# Altium PCB EMG_MainBoard_Layout.PcbDoc (part 1 of 5)
Units mm, origin at the board's own origin, x right, y up, seen from the top; angles counter-clockwise.
Board outline 80 x 45 mm, 4 copper layers (L1 TOP, L2 GND, L3 POWER SIGNAL, L4 BOTTOM GND), stack 1.164 mm thick; 231 components, 136 nets, 808 pads, 48 vias.
Unrouted connection lines stored in the file: 570.
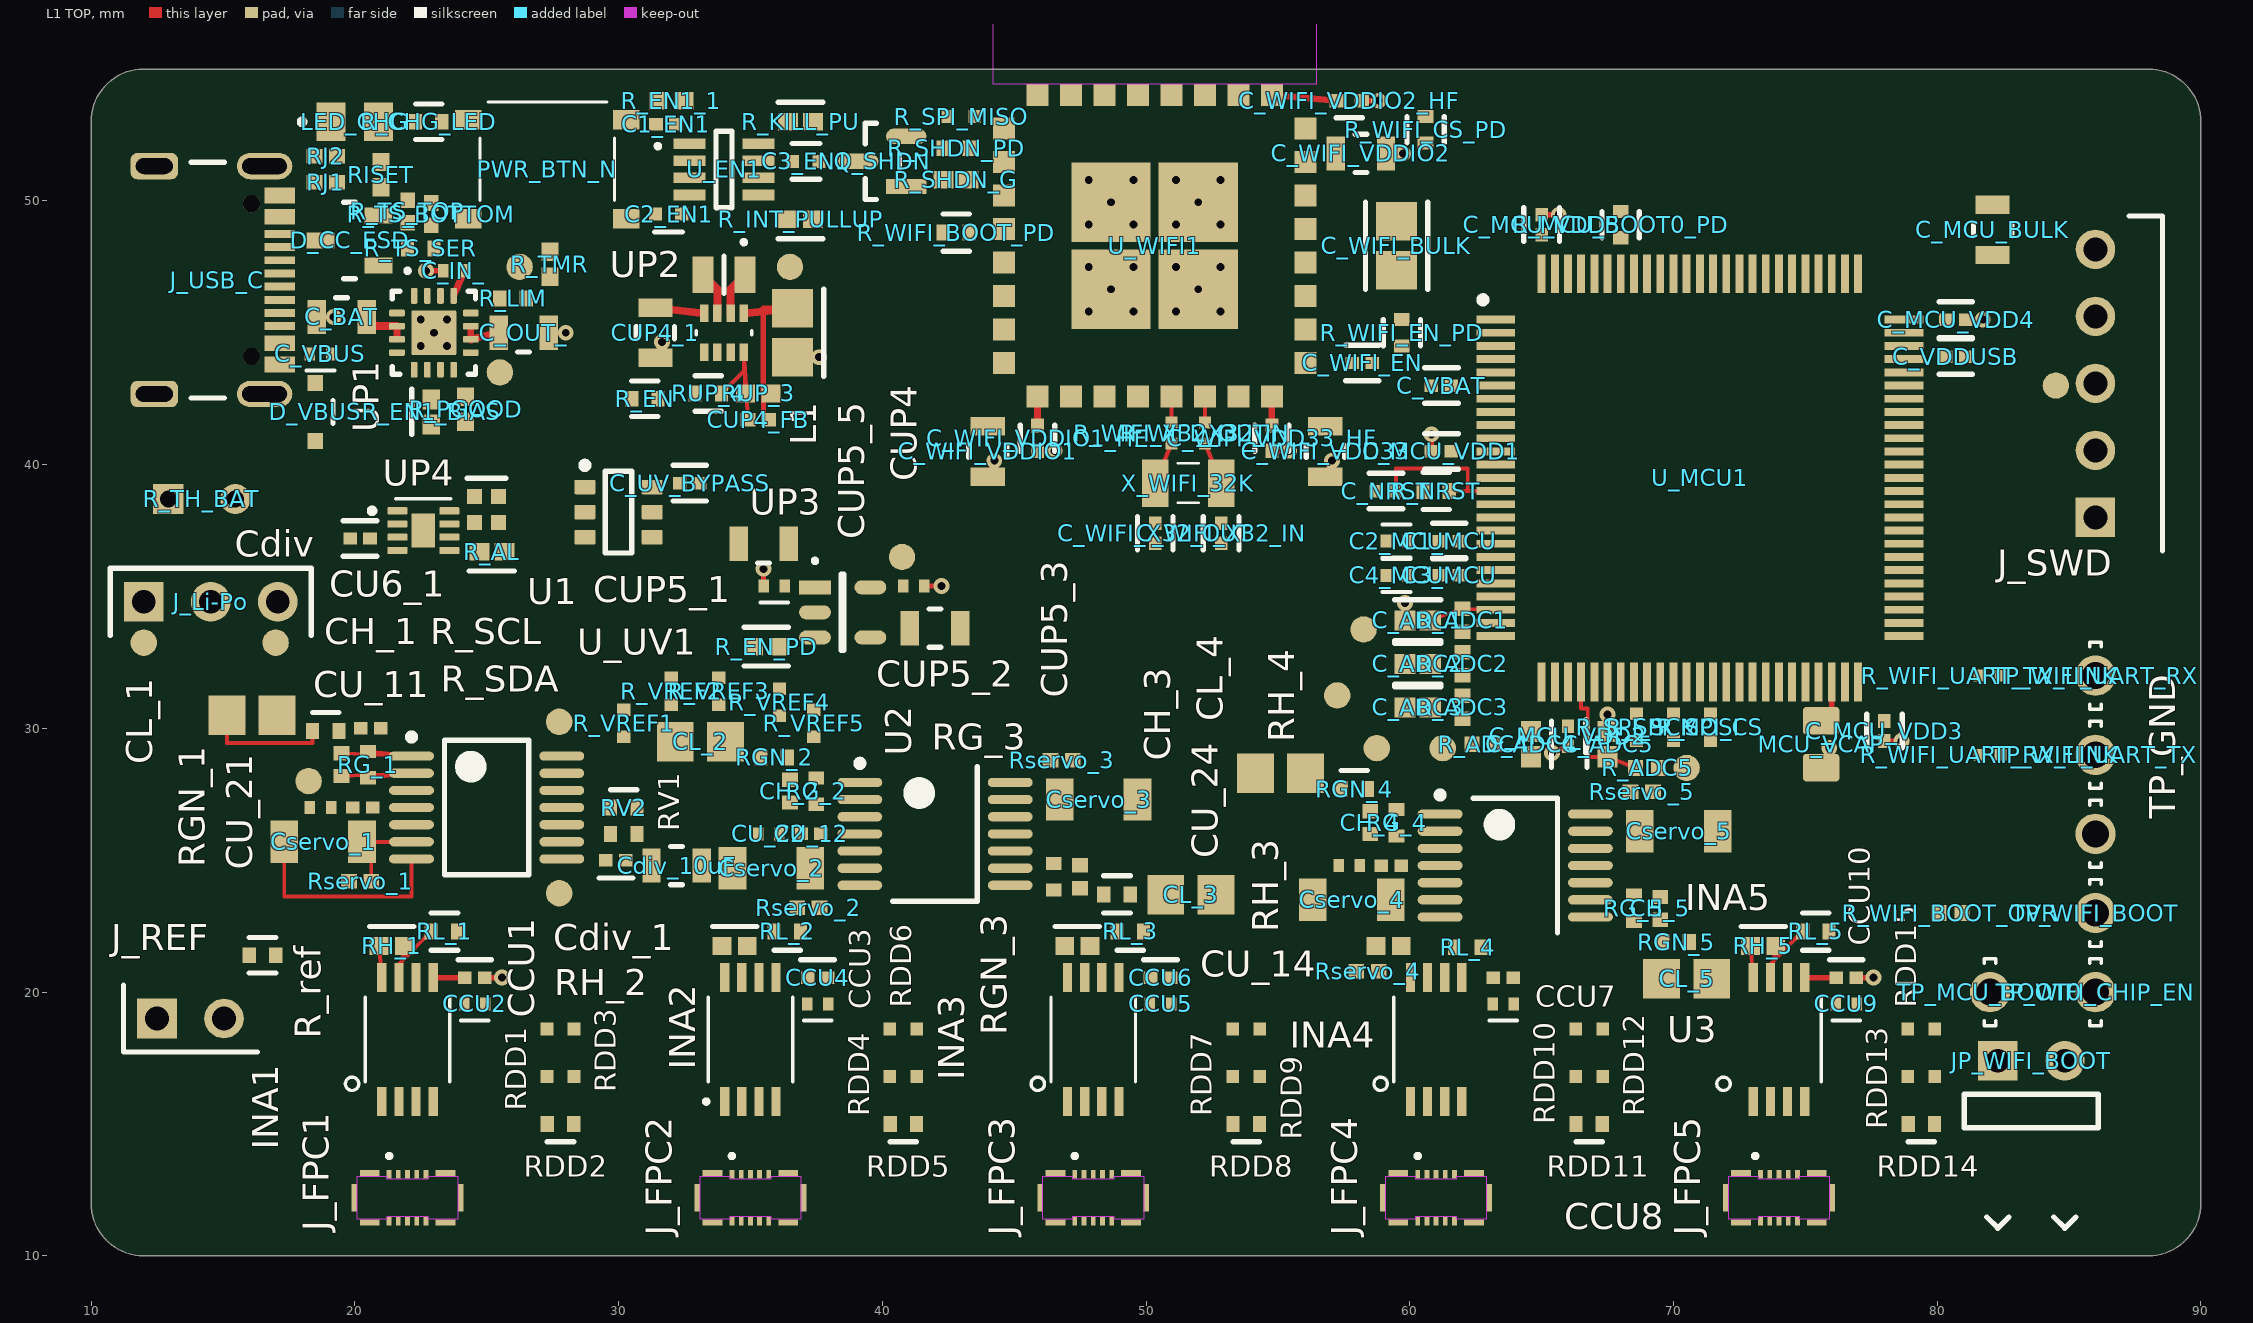
[diagram p0: L1 TOP view]
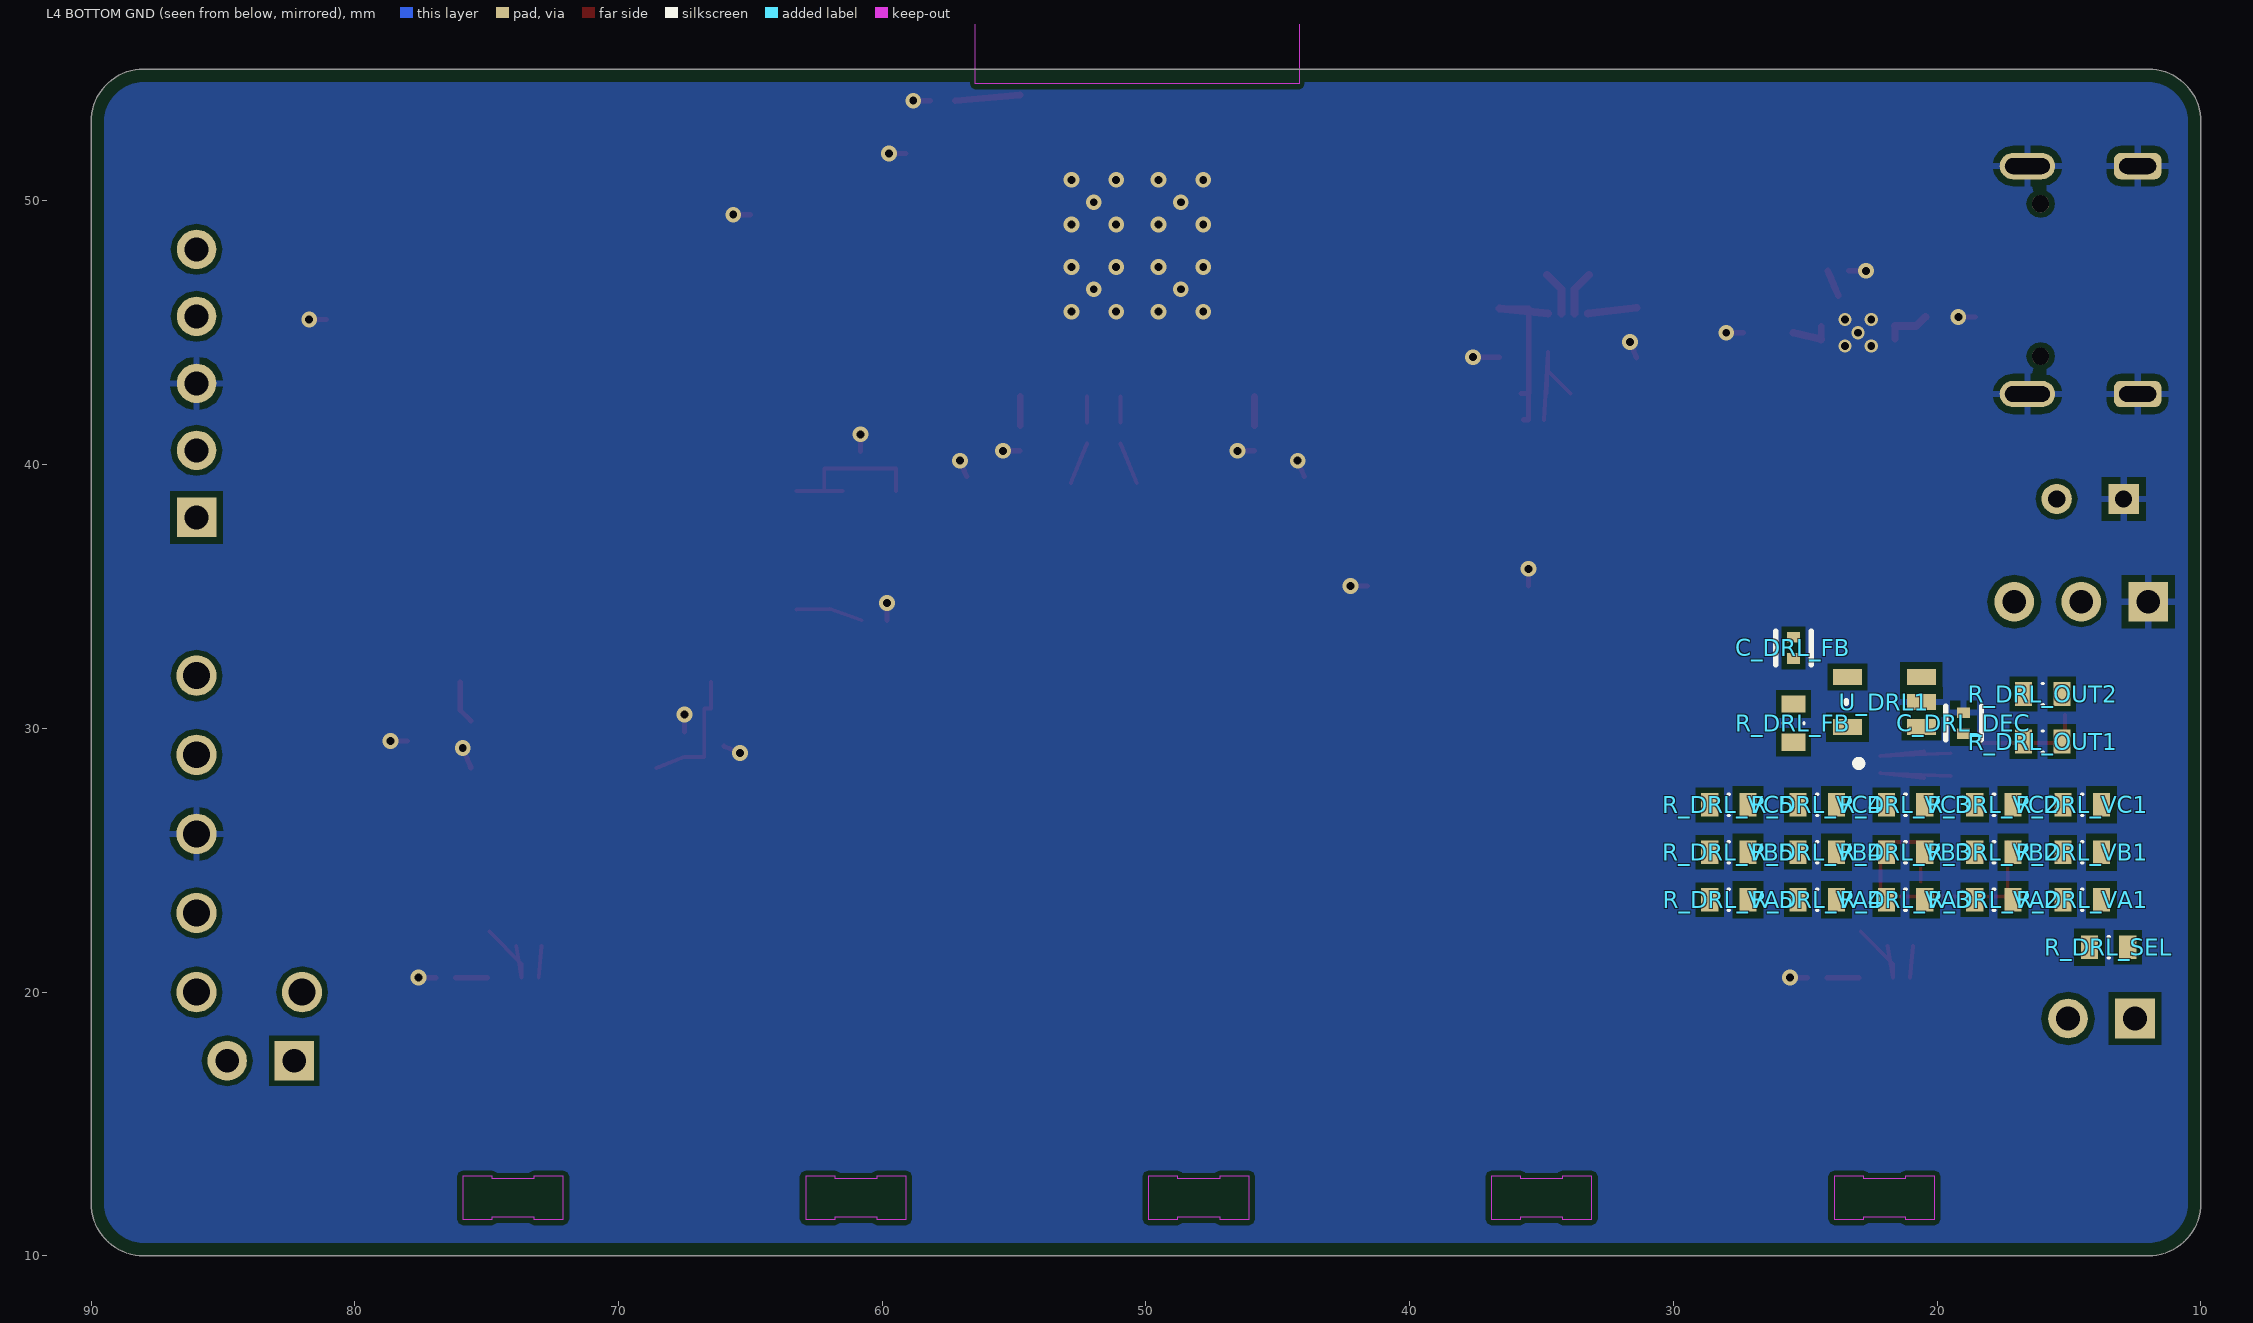
[diagram p1: L4 BOTTOM GND view, seen from below]
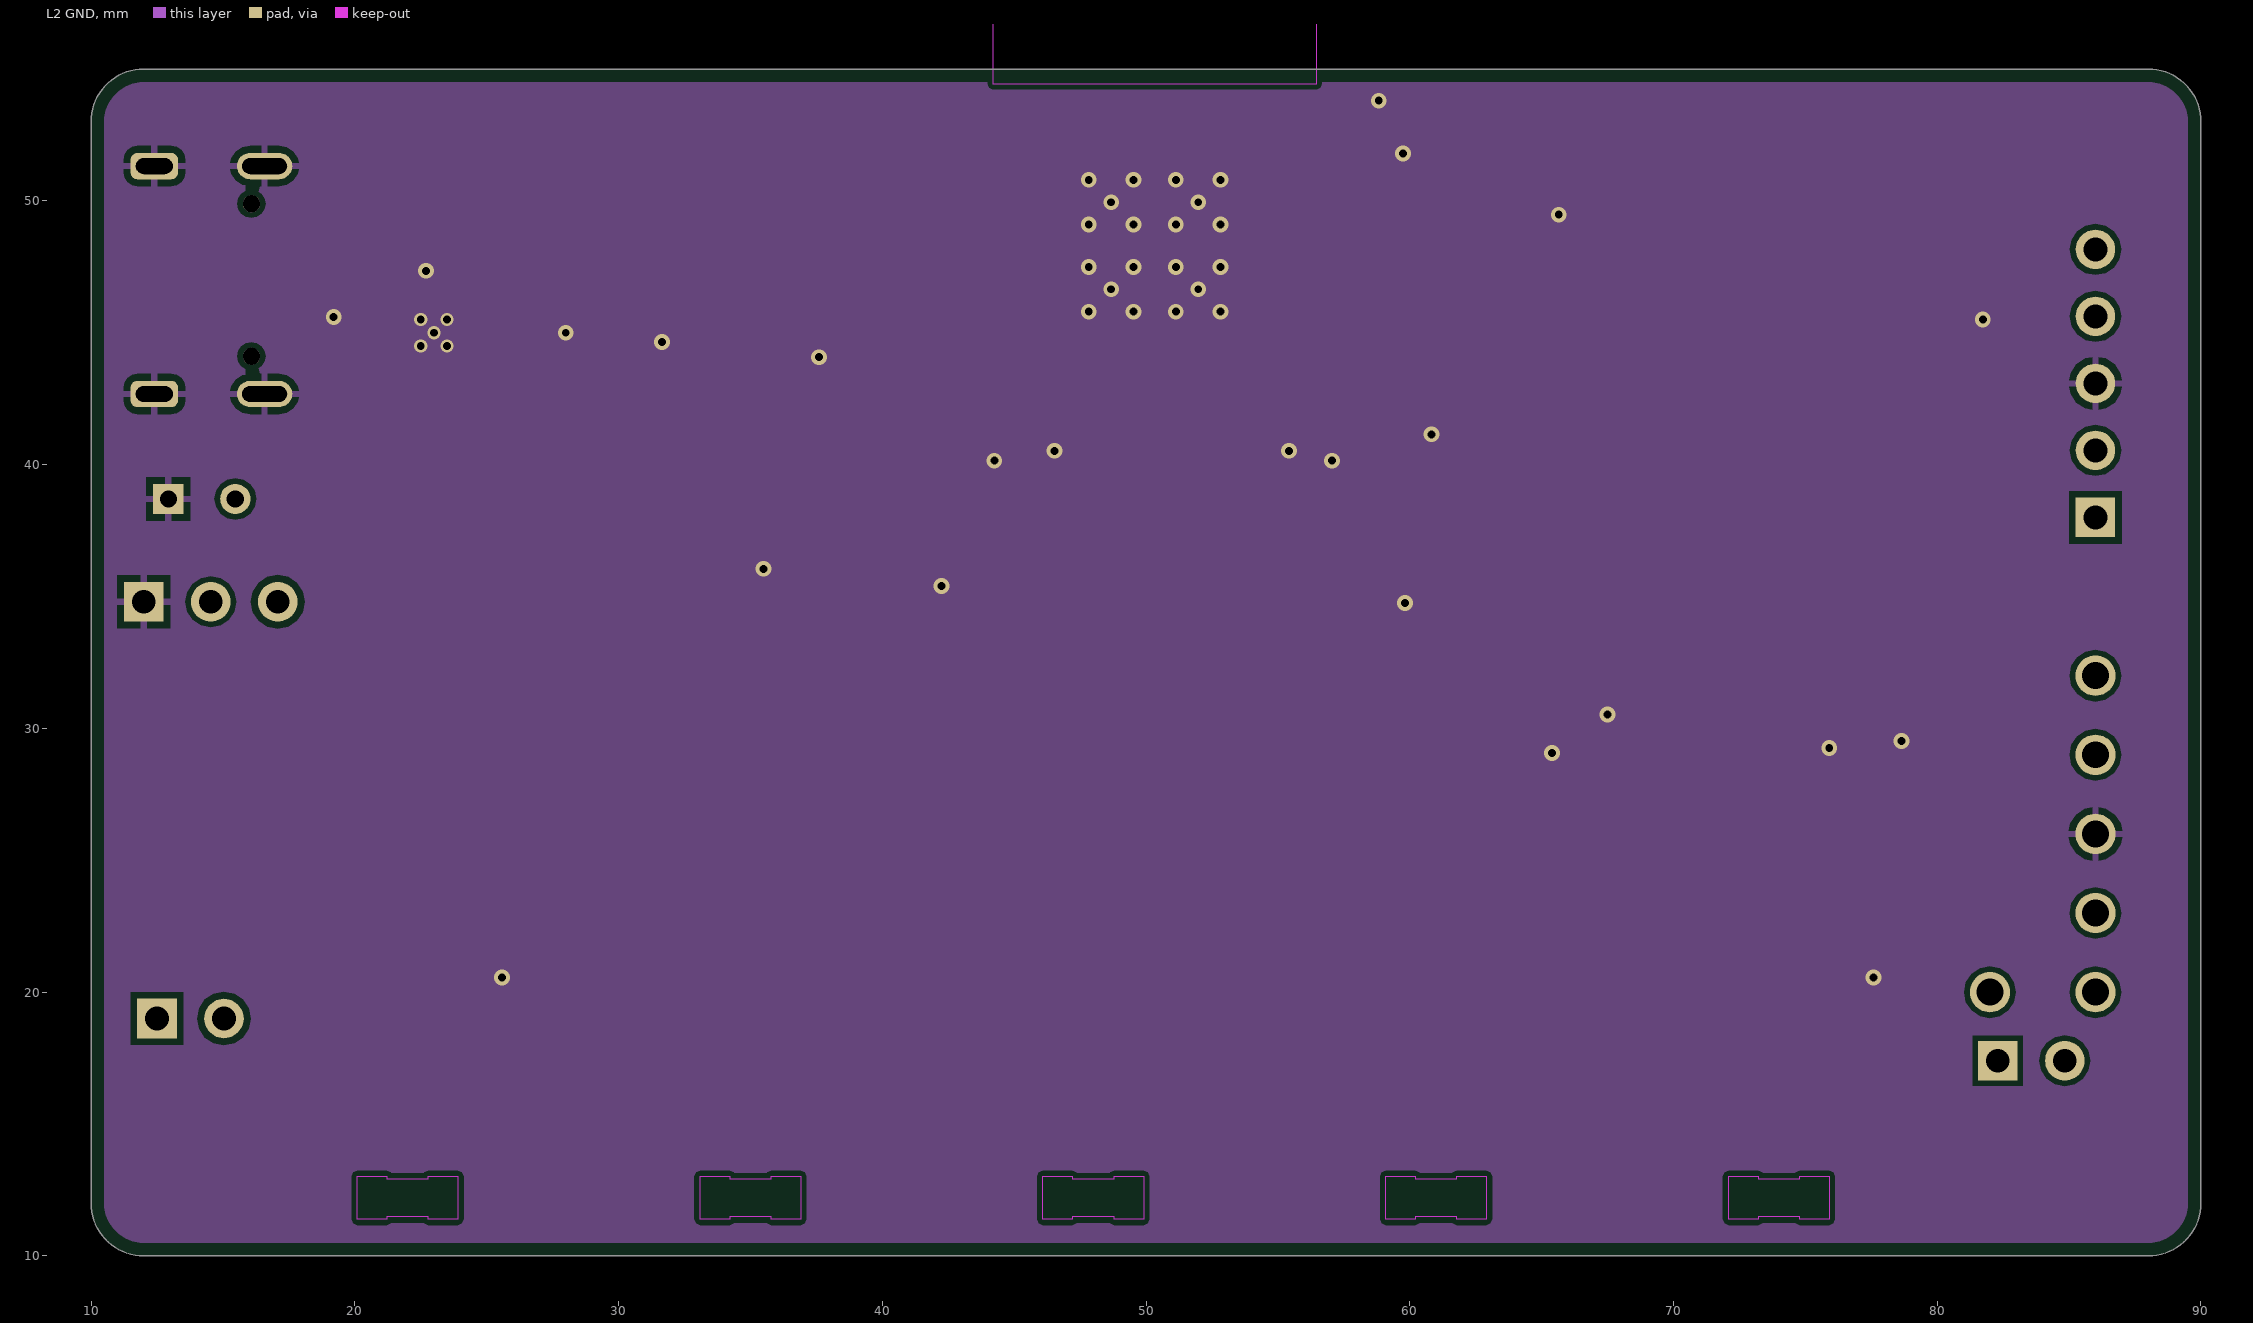
[diagram p2: L2 GND]

## Layer stack, top to bottom
Top Solder: solder mask 0.0102, Solder Resist, Dk 3.5
L1 TOP: signal copper 0.035
Dielectric 1: prepreg 0.0994, JLC3313 prepreg, Dk 4.1
L2 GND: signal copper 0.0152
Dielectric2: core 0.865, JLC core, Dk 4.6
L3 POWER SIGNAL: signal copper 0.0152
Dielectric3: prepreg 0.0994, JLC3313 prepreg, Dk 4.1
L4 BOTTOM GND: signal copper 0.035
Bottom Solder: solder mask 0.0102, Solder Resist, Dk 3.5

## Board outline
12,10 88,10 ccw(c88,12) 90,12 90,53 ccw(c88,53) 88,55 12,55 ccw(c12,53) 10,53 10,12 ccw(c12,12)

## Design rules (kind name [scope] priority, off if disabled: settings)
BoardOutlineClearance EDGE_050_GENERAL_PROVISIONAL [All] p1: gap=0.254 ignorepadtopadclearanceinfootprint=FALSE except(0: Arc-SplitContinuation Track-SplitContinuation SMDPad-SplitContinuation THPad-SplitContinuation Via-SplitContinuation Fill-SplitContinuation Poly-SplitContinuation Region-SplitContinuation Text-SplitContinuation; 0.5: Arc-OutlineEdge Track-OutlineEdge SMDPad-OutlineEdge THPad-OutlineEdge Via-OutlineEdge Fill-OutlineEdge Poly-OutlineEdge Region-OutlineEdge Text-OutlineEdge)
Clearance CLR_ST67_ANTENNA_BOUNDARY_NO_EXTRA_GAP [IsPad And InComponent('U_WIFI1') And ((Name = 'U_WIFI1-25') Or (Name = 'U_WIFI1-26') Or (Name = 'U_WIFI1-27') Or (Name = 'U_WIFI1-28') Or (Name = 'U_WIFI1-29') Or (Name = 'U_WIFI1-30') Or (Name = 'U_WIFI1-31') Or (Name = 'U_WIFI1-32')) vs IsRegion And OnLayer('Keep-Out Layer') And InRegionAbsolute(1739.72440945,2143.26771654,2223.26771654,2340.19685039)] p1: gap=0 ignorepadtopadclearanceinfootprint=FALSE
Clearance CLR_FINAL_TT_073 [IsTrack And InNet('NetL1_2') And InRegionAbsolute(1340.551184,1792.716484,1448.818916,1844.488116) vs IsTrack And InNet('3V3_DIG') And InRegionAbsolute(1340.551184,1792.716484,1448.818916,1844.488116)] p2: gap=0.175 ignorepadtopadclearanceinfootprint=FALSE
Clearance CLR_FINAL_TT_072 [IsTrack And InNet('VSYS') And InRegionAbsolute(1228.346484,1792.716484,1336.614216,1844.488116) vs IsTrack And InNet('NetL1_1') And InRegionAbsolute(1228.346484,1792.716484,1336.614216,1844.488116)] p3: gap=0.175 ignorepadtopadclearanceinfootprint=FALSE
Clearance CLR_FINAL_TP_071 [IsTrack And InNet('NetL1_1') And InRegionAbsolute(1320.866184,1792.716484,1336.614216,1844.488116) vs IsPad And (Name = 'UP2-4')] p4: gap=0.15 ignorepadtopadclearanceinfootprint=FALSE
Clearance CLR_FINAL_TP_070 [IsTrack And InNet('VSYS') And InRegionAbsolute(1228.346484,1792.716484,1316.929116,1816.929116) vs IsPad And (Name = 'UP2-3')] p5: gap=0.15 ignorepadtopadclearanceinfootprint=FALSE
Clearance CLR_FINAL_TP_069 [IsTrack And InNet('3V3_DIG') And InRegionAbsolute(1360.236284,1792.716484,1448.818916,1815.975616) vs IsPad And (Name = 'UP2-2')] p6: gap=0.15 ignorepadtopadclearanceinfootprint=FALSE
Clearance CLR_FINAL_TP_068 [IsTrack And InNet('NetL1_2') And InRegionAbsolute(1340.551184,1792.716484,1356.299216,1844.488116) vs IsPad And (Name = 'UP2-1')] p7: gap=0.15 ignorepadtopadclearanceinfootprint=FALSE
Clearance CLR_FINAL_TP_067 [IsTrack And InNet('VSYS') And InRegionAbsolute(952.755784,1753.936984,1009.842516,1779.527516) vs IsPad And (Name = 'UP1-9')] p8: gap=0.2 ignorepadtopadclearanceinfootprint=FALSE
Clearance CLR_FINAL_TP_066 [IsTrack And InNet('VBAT_CELL') And InRegionAbsolute(811.023584,1773.622084,858.267616,1789.370116) vs IsPad And (Name = 'UP1-1')] p9: gap=0.2 ignorepadtopadclearanceinfootprint=FALSE
Clearance CLR_FINAL_TP_065 [IsTrack And InNet('3V3_DIG') And InRegionAbsolute(1389.341784,1633.858284,1416.478916,1815.975616) vs IsPad And (Name = 'RUP_3-1')] p10: gap=0.2 ignorepadtopadclearanceinfootprint=FALSE
Clearance CLR_FINAL_PP_064 [IsPad And (Name = 'RUP_3-1') vs IsPad And (Name = 'RUP_3-2')] p11: gap=0.2 ignorepadtopadclearanceinfootprint=FALSE
Clearance CLR_FINAL_PP_063 [IsPad And (Name = 'R_KILL_PU-1') vs IsPad And (Name = 'R_KILL_PU-2')] p12: gap=0.175 ignorepadtopadclearanceinfootprint=FALSE
Clearance CLR_FINAL_PP_062 [IsPad And (Name = 'R_INT_PULLUP-1') vs IsPad And (Name = 'R_INT_PULLUP-2')] p13: gap=0.175 ignorepadtopadclearanceinfootprint=FALSE
Clearance CLR_FINAL_PP_061 [IsPad And (Name = 'R_EN1_BIAS-1') vs IsPad And (Name = 'R_EN1_BIAS-2')] p14: gap=0.175 ignorepadtopadclearanceinfootprint=FALSE
Clearance CLR_FINAL_PP_060 [IsPad And (Name = 'R_EN1_1-1') vs IsPad And (Name = 'R_EN1_1-2')] p15: gap=0.2 ignorepadtopadclearanceinfootprint=FALSE
Clearance CLR_FINAL_PP_059 [IsPad And (Name = 'R_AL-1') vs IsPad And (Name = 'R_AL-2')] p16: gap=0.175 ignorepadtopadclearanceinfootprint=FALSE
Clearance CLR_FINAL_PP_058 [IsPad And (Name = 'R_ADC1-2') vs IsPad And (Name = 'U_MCU1-22')] p17: gap=0.2 ignorepadtopadclearanceinfootprint=FALSE
Clearance CLR_FINAL_PP_057 [IsPad And (Name = 'J_USB_C-B4_A9') vs IsPad And (Name = 'J_USB_C-B5')] p18: gap=0.175 ignorepadtopadclearanceinfootprint=FALSE
Clearance CLR_FINAL_PP_056 [IsPad And (Name = 'J_USB_C-B1_A12') vs IsPad And (Name = 'J_USB_C-B4_A9')] p19: gap=0.175 ignorepadtopadclearanceinfootprint=FALSE
Clearance CLR_FINAL_PP_055 [IsPad And (Name = 'J_USB_C-A4_B9') vs IsPad And (Name = 'J_USB_C-B8')] p20: gap=0.175 ignorepadtopadclearanceinfootprint=FALSE
Clearance CLR_FINAL_PP_054 [IsPad And (Name = 'J_USB_C-A1_B12') vs IsPad And (Name = 'J_USB_C-A4_B9')] p21: gap=0.175 ignorepadtopadclearanceinfootprint=FALSE
Clearance CLR_FINAL_PP_053 [IsPad And InComponent('J_USB_C') And InRegionAbsolute(632.283598,1963.385598,633.858402,1964.960402) vs IsPad And (Name = 'J_USB_C-A4_B9')] p22: gap=0.2 ignorepadtopadclearanceinfootprint=FALSE
Clearance CLR_FINAL_PP_052 [IsPad And InComponent('J_USB_C') And InRegionAbsolute(632.283598,1735.826598,633.858402,1737.401402) vs IsPad And (Name = 'J_USB_C-B4_A9')] p23: gap=0.2 ignorepadtopadclearanceinfootprint=FALSE
Clearance CLR_FINAL_TP_051 [IsTrack And InNet('3V3_DIG') And InRegionAbsolute(1389.341784,1633.858284,1405.315016,1815.975616) vs IsPad And (Name = 'CUP4-2')] p24: gap=0.2 ignorepadtopadclearanceinfootprint=FALSE
Clearance CLR_FINAL_TP_050 [IsTrack And InNet('3V3_DIG') And InRegionAbsolute(1389.566984,1633.858284,1412.992216,1815.975616) vs IsPad And (Name = 'CUP4_FB-1')] p25: gap=0.2 ignorepadtopadclearanceinfootprint=FALSE
Clearance CLR_FINAL_PP_049 [IsPad And (Name = 'CUP4_FB-1') vs IsPad And (Name = 'CUP4_FB-2')] p26: gap=0.2 ignorepadtopadclearanceinfootprint=FALSE
Clearance CLR_FINAL_PP_048 [IsPad And (Name = 'CU6_1-1') vs IsPad And (Name = 'CU6_1-2')] p27: gap=0.2 ignorepadtopadclearanceinfootprint=FALSE
Clearance CLR_FINAL_PP_047 [IsPad And (Name = 'CU_14-1') vs IsPad And (Name = 'CU_14-2')] p28: gap=0.2 ignorepadtopadclearanceinfootprint=FALSE
Clearance CLR_FINAL_PP_046 [IsPad And (Name = 'CU_12-1') vs IsPad And (Name = 'CU_12-2')] p29: gap=0.2 ignorepadtopadclearanceinfootprint=FALSE
Clearance CLR_FINAL_PP_045 [IsPad And (Name = 'CU_11-1') vs IsPad And (Name = 'CU_11-2')] p30: gap=0.2 ignorepadtopadclearanceinfootprint=FALSE
Clearance CLR_FINAL_PP_044 [IsPad And (Name = 'Cdiv-1') vs IsPad And (Name = 'Cdiv-2')] p31: gap=0.2 ignorepadtopadclearanceinfootprint=FALSE
Clearance CLR_FINAL_PP_043 [IsPad And (Name = 'CCU8-1') vs IsPad And (Name = 'CCU8-2')] p32: gap=0.2 ignorepadtopadclearanceinfootprint=FALSE
Clearance CLR_FINAL_PP_042 [IsPad And (Name = 'CCU6-1') vs IsPad And (Name = 'CCU6-2')] p33: gap=0.2 ignorepadtopadclearanceinfootprint=FALSE
Clearance CLR_FINAL_PP_041 [IsPad And (Name = 'CCU4-1') vs IsPad And (Name = 'CCU4-2')] p34: gap=0.2 ignorepadtopadclearanceinfootprint=FALSE
Clearance CLR_FINAL_PP_040 [IsPad And (Name = 'CCU1-1') vs IsPad And (Name = 'CCU1-2')] p35: gap=0.2 ignorepadtopadclearanceinfootprint=FALSE
Clearance CLR_FINAL_PP_039 [IsPad And (Name = 'CCU10-1') vs IsPad And (Name = 'CCU10-2')] p36: gap=0.2 ignorepadtopadclearanceinfootprint=FALSE
Clearance CLR_FINAL_PP_038 [IsPad And (Name = 'C3_MCU-1') vs IsPad And (Name = 'C3_MCU-2')] p37: gap=0.2 ignorepadtopadclearanceinfootprint=FALSE
Clearance CLR_FINAL_PP_037 [IsPad And (Name = 'C1_MCU-1') vs IsPad And (Name = 'C1_MCU-2')] p38: gap=0.2 ignorepadtopadclearanceinfootprint=FALSE
Clearance CLR_FINAL_PP_036 [IsPad And (Name = 'C_VDDUSB-1') vs IsPad And (Name = 'C_VDDUSB-2')] p39: gap=0.2 ignorepadtopadclearanceinfootprint=FALSE
Clearance CLR_FINAL_PP_035 [IsPad And (Name = 'C_VBAT-1') vs IsPad And (Name = 'C_VBAT-2')] p40: gap=0.2 ignorepadtopadclearanceinfootprint=FALSE
Clearance CLR_FINAL_PP_034 [IsPad And (Name = 'C_UV_BYPASS-1') vs IsPad And (Name = 'C_UV_BYPASS-2')] p41: gap=0.2 ignorepadtopadclearanceinfootprint=FALSE
Clearance CLR_FINAL_PP_033 [IsPad And (Name = 'C_MCU_VDD5-1') vs IsPad And (Name = 'C_MCU_VDD5-2')] p42: gap=0.2 ignorepadtopadclearanceinfootprint=FALSE
Clearance CLR_FINAL_PP_032 [IsPad And (Name = 'C_MCU_VDD4-1') vs IsPad And (Name = 'C_MCU_VDD4-2')] p43: gap=0.2 ignorepadtopadclearanceinfootprint=FALSE
Clearance CLR_FINAL_PP_031 [IsPad And (Name = 'C_MCU_VDD3-1') vs IsPad And (Name = 'C_MCU_VDD3-2')] p44: gap=0.2 ignorepadtopadclearanceinfootprint=FALSE
Clearance CLR_FINAL_PP_030 [IsPad And (Name = 'C_MCU_VDD2-1') vs IsPad And (Name = 'C_MCU_VDD2-2')] p45: gap=0.2 ignorepadtopadclearanceinfootprint=FALSE
Clearance CLR_FINAL_PP_029 [IsPad And (Name = 'C_MCU_VDD1-1') vs IsPad And (Name = 'C_MCU_VDD1-2')] p46: gap=0.2 ignorepadtopadclearanceinfootprint=FALSE
Clearance CLR_FINAL_TP_028 [IsTrack And InNet('ADC_EMG5') And InRegionAbsolute(2610.236184,1130.826784,2635.826816,1218.503916) vs IsPad And (Name = 'U_MCU1-30')] p47: gap=0.2 ignorepadtopadclearanceinfootprint=FALSE
Clearance CLR_FINAL_TP_027 [IsTrack And InNet('Vservo_1') And InRegionAbsolute(674.212584,922.244084,879.921316,937.992116) vs IsPad And (Name = 'Rservo_1-2')] p48: gap=0.2 ignorepadtopadclearanceinfootprint=FALSE
Clearance CLR_FINAL_TP_026 [IsTrack And InNet('Vservo_1') And InRegionAbsolute(674.212584,922.244084,879.921316,937.992116) vs IsPad And (Name = 'Rservo_1-1')] p49: gap=0.2 ignorepadtopadclearanceinfootprint=FALSE
Clearance CLR_FINAL_PP_025 [IsPad And (Name = 'RH_5-1') vs IsPad And (Name = 'RH_5-2')] p50: gap=0.2 ignorepadtopadclearanceinfootprint=FALSE
Clearance CLR_FINAL_PP_024 [IsPad And (Name = 'RH_4-1') vs IsPad And (Name = 'RH_4-2')] p51: gap=0.2 ignorepadtopadclearanceinfootprint=FALSE
Clearance CLR_FINAL_PP_023 [IsPad And (Name = 'RH_3-1') vs IsPad And (Name = 'RH_3-2')] p52: gap=0.2 ignorepadtopadclearanceinfootprint=FALSE
Clearance CLR_FINAL_PP_022 [IsPad And (Name = 'RH_2-1') vs IsPad And (Name = 'RH_2-2')] p53: gap=0.2 ignorepadtopadclearanceinfootprint=FALSE
Clearance CLR_FINAL_PP_021 [IsPad And (Name = 'RH_1-1') vs IsPad And (Name = 'RH_1-2')] p54: gap=0.2 ignorepadtopadclearanceinfootprint=FALSE
Clearance CLR_FINAL_PP_020 [IsPad And (Name = 'R_ADC2-1') vs IsPad And (Name = 'R_ADC3-2')] p55: gap=0.2 ignorepadtopadclearanceinfootprint=FALSE
Clearance CLR_FINAL_PP_019 [IsPad And (Name = 'R_ADC1-2') vs IsPad And (Name = 'U_MCU1-24')] p56: gap=0.2 ignorepadtopadclearanceinfootprint=FALSE
Clearance CLR_FINAL_PP_018 [IsPad And (Name = 'R_ADC1-1') vs IsPad And (Name = 'U_MCU1-25')] p57: gap=0.2 ignorepadtopadclearanceinfootprint=FALSE
Clearance CLR_FINAL_PP_017 [IsPad And (Name = 'R_ADC1-1') vs IsPad And (Name = 'U_MCU1-24')] p58: gap=0.2 ignorepadtopadclearanceinfootprint=FALSE
Clearance CLR_FINAL_PP_016 [IsPad And (Name = 'R_ADC1-1') vs IsPad And (Name = 'R_ADC2-2')] p59: gap=0.2 ignorepadtopadclearanceinfootprint=FALSE
Clearance CLR_FINAL_TP_015 [IsTrack And InNet('NetINA5_7') And InRegionAbsolute(2892.711784,821.845684,2956.692916,885.826816) vs IsPad And (Name = 'INA5-6')] p60: gap=0.2 ignorepadtopadclearanceinfootprint=FALSE
Clearance CLR_FINAL_TP_014 [IsTrack And InNet('NetINA1_7') And InRegionAbsolute(845.467684,821.845684,909.448816,885.826816) vs IsPad And (Name = 'INA1-6')] p61: gap=0.2 ignorepadtopadclearanceinfootprint=FALSE
Clearance CLR_FINAL_TP_013 [IsTrack And InNet('NetCL_1_1') And InRegionAbsolute(588.582684,1151.574884,732.283516,1167.322916) vs IsPad And (Name = 'CL_1-2')] p62: gap=0.2 ignorepadtopadclearanceinfootprint=FALSE
Clearance CLR_FINAL_PP_012 [IsPad And (Name = 'Cdiv_1-1') vs IsPad And (Name = 'Cdiv_1-2')] p63: gap=0.2 ignorepadtopadclearanceinfootprint=FALSE
Clearance CLR_FINAL_PP_011 [IsPad And (Name = 'C_ADC5-1') vs IsPad And (Name = 'C_ADC5-2')] p64: gap=0.125 ignorepadtopadclearanceinfootprint=FALSE
Clearance CLR_FINAL_PP_010 [IsPad And (Name = 'C_ADC4-1') vs IsPad And (Name = 'C_ADC4-2')] p65: gap=0.125 ignorepadtopadclearanceinfootprint=FALSE
Clearance CLR_FINAL_PP_009 [IsPad And (Name = 'C_ADC3-1') vs IsPad And (Name = 'C_ADC3-2')] p66: gap=0.125 ignorepadtopadclearanceinfootprint=FALSE
Clearance CLR_FINAL_PP_008 [IsPad And (Name = 'C_ADC2-1') vs IsPad And (Name = 'C_ADC2-2')] p67: gap=0.125 ignorepadtopadclearanceinfootprint=FALSE
Clearance CLR_FINAL_PP_007 [IsPad And (Name = 'C_ADC1-1') vs IsPad And (Name = 'C_ADC1-2')] p68: gap=0.125 ignorepadtopadclearanceinfootprint=FALSE
Clearance CLR_FINAL_TP_006 [IsTrack And InNet('NetL1_2') And InRegionAbsolute(1340.551184,1792.716484,1356.299216,1844.488116) vs IsPad And (Name = 'UP2-3')] p69: gap=0.15 ignorepadtopadclearanceinfootprint=FALSE
Clearance CLR_FINAL_TP_005 [IsTrack And InNet('NetL1_1') And InRegionAbsolute(1320.866184,1792.716484,1336.614216,1844.488116) vs IsPad And (Name = 'UP2-2')] p70: gap=0.15 ignorepadtopadclearanceinfootprint=FALSE
Clearance CLR_FINAL_VP_004 [IsVia And InNet('GND') And InRegionAbsolute(2657.086299,1201.456299,2657.873701,1202.243701) vs IsPad And (Name = 'U_MCU1-31')] p71: gap=0.175 ignorepadtopadclearanceinfootprint=FALSE
Clearance CLR_FINAL_PP_003 [IsPad And (Name = 'R_SHDN_G-1') vs IsPad And (Name = 'R_SHDN_G-2')] p72: gap=0.175 ignorepadtopadclearanceinfootprint=FALSE
Clearance CLR_FINAL_PP_002 [IsPad And InComponent('J_USB_C') And InRegionAbsolute(632.283598,1963.385598,633.858402,1964.960402) vs IsPad And (Name = 'J_USB_C-A1_B12')] p73: gap=0.175 ignorepadtopadclearanceinfootprint=FALSE
Clearance CLR_FINAL_PP_001 [IsPad And InComponent('J_USB_C') And InRegionAbsolute(632.283598,1735.826598,633.858402,1737.401402) vs IsPad And (Name = 'J_USB_C-B1_A12')] p74: gap=0.175 ignorepadtopadclearanceinfootprint=FALSE
Clearance CLR_PADS_J_FPC5_010 [IsPad And InComponent('J_FPC5') vs IsPad And InComponent('J_FPC5')] p75: gap=0.1 ignorepadtopadclearanceinfootprint=FALSE
Clearance CLR_PADS_J_FPC4_010 [IsPad And InComponent('J_FPC4') vs IsPad And InComponent('J_FPC4')] p76: gap=0.1 ignorepadtopadclearanceinfootprint=FALSE
Clearance CLR_PADS_J_FPC3_010 [IsPad And InComponent('J_FPC3') vs IsPad And InComponent('J_FPC3')] p77: gap=0.1 ignorepadtopadclearanceinfootprint=FALSE
Clearance CLR_PADS_J_FPC2_010 [IsPad And InComponent('J_FPC2') vs IsPad And InComponent('J_FPC2')] p78: gap=0.1 ignorepadtopadclearanceinfootprint=FALSE
Clearance CLR_PADS_J_FPC1_010 [IsPad And InComponent('J_FPC1') vs IsPad And InComponent('J_FPC1')] p79: gap=0.1 ignorepadtopadclearanceinfootprint=FALSE
Clearance CLR_PADS_UP4_010 [IsPad And InComponent('UP4') vs IsPad And InComponent('UP4')] p80: gap=0.1 ignorepadtopadclearanceinfootprint=FALSE
Clearance CLR_PADS_UP2_010 [IsPad And InComponent('UP2') vs IsPad And InComponent('UP2')] p81: gap=0.1 ignorepadtopadclearanceinfootprint=FALSE
Clearance CLR_PADS_UP1_010 [IsPad And InComponent('UP1') vs IsPad And InComponent('UP1')] p82: gap=0.1 ignorepadtopadclearanceinfootprint=FALSE
Clearance CLR_PADS_U_MCU1_010 [IsPad And InComponent('U_MCU1') vs IsPad And InComponent('U_MCU1')] p83: gap=0.1 ignorepadtopadclearanceinfootprint=FALSE
Clearance CLR_POWER_025 [InNetClass('EMG_POWER')] p84: gap=0.25 ignorepadtopadclearanceinfootprint=FALSE
Clearance CLR_ANALOG_025 [InNetClass('EMG_ANALOG') Or InNetClass('EMG_ADC') Or InNetClass('EMG_REFERENCE')] p85: gap=0.25 ignorepadtopadclearanceinfootprint=FALSE
Clearance CLR_GENERAL_020 [All] p86: gap=0.2 ignorepadtopadclearanceinfootprint=FALSE
Clearance [All] p87: gap=0.254 ignorepadtopadclearanceinfootprint=FALSE except(0: Arc-Hole Track-Hole SMDPad-Hole THPad-Hole Via-Hole Fill-Hole Poly-Hole Region-Hole Text-Hole)
ComponentClearance CMP_CLEARANCE_020 [All] p1: gap=0.2 collisioncheckmode=3 verticalgap=0.5 showdistances=FALSE
ComponentClearance [All] p2: gap=0.254 collisioncheckmode=3 verticalgap=0.254 showdistances=FALSE
MinimumSolderMaskSliver [All] p1: minsoldermaskwidth=0.1
PolygonConnect POLYGON_GND_VIAS_DIRECT [IsVia And InNet('GND')] p1: connectstyle=Direct reliefconductorwidth=0.254 reliefentries=4 polygonreliefangle="90 Angle" airgapwidth=0.254
PolygonConnect [All] p2: connectstyle=Relief reliefconductorwidth=0.254 reliefentries=4 polygonreliefangle="90 Angle" airgapwidth=0.254
RoutingVias VIA_STD_060_030 [All] p1: holewidth=0.3 width=0.6 viastyle="Through Hole" minholewidth=0.3 minwidth=0.6 maxholewidth=0.3 maxwidth=0.6
RoutingVias [All] p2: holewidth=0.711 width=1.27 viastyle="Through Hole" minholewidth=0.711 minwidth=1.27 maxholewidth=0.711 maxwidth=1.27
SolderMaskExpansion [All] p1: expansion=0.05 istentingtop=FALSE
Width WIDTH_EMG_GND [InNetClass('EMG_GND')] p1: maxlimit=3 minlimit=0.15 preferedwidth=0.4 minimp=50.000000 maximp=50.000000 favimp=50.000000
Width WIDTH_EMG_SWITCH [InNetClass('EMG_SWITCH')] p2: maxlimit=1.5 minlimit=0.2 preferedwidth=0.5 minimp=50.000000 maximp=50.000000 favimp=50.000000
Width WIDTH_EMG_CRYSTAL [InNetClass('EMG_CRYSTAL')] p3: maxlimit=0.3 minlimit=0.15 preferedwidth=0.2 minimp=50.000000 maximp=50.000000 favimp=50.000000
Width WIDTH_EMG_SPI [InNetClass('EMG_SPI')] p4: maxlimit=0.3 minlimit=0.15 preferedwidth=0.18 minimp=50.000000 maximp=50.000000 favimp=50.000000
Width WIDTH_EMG_POWER [InNetClass('EMG_POWER')] p5: maxlimit=3 minlimit=0.15 preferedwidth=0.9 minimp=50.000000 maximp=50.000000 favimp=50.000000
Width WIDTH_EMG_REFERENCE [InNetClass('EMG_REFERENCE')] p6: maxlimit=0.5 minlimit=0.15 preferedwidth=0.3 minimp=50.000000 maximp=50.000000 favimp=50.000000
Width WIDTH_EMG_ADC [InNetClass('EMG_ADC')] p7: maxlimit=0.3 minlimit=0.15 preferedwidth=0.2 minimp=50.000000 maximp=50.000000 favimp=50.000000
Width WIDTH_EMG_ANALOG [InNetClass('EMG_ANALOG')] p8: maxlimit=0.4 minlimit=0.15 preferedwidth=0.2 minimp=50.000000 maximp=50.000000 favimp=50.000000
Width WIDTH_EMG_CONTROL [InNetClass('EMG_CONTROL')] p9: maxlimit=0.5 minlimit=0.15 preferedwidth=0.2 minimp=50.000000 maximp=50.000000 favimp=50.000000
Width [All] p10: maxlimit=0.254 minlimit=0.254 preferedwidth=0.254
28 further rules are at their usual default settings.

## Classes and differential pairs
component class RADIO: C_WIFI_BULK C_WIFI_EN C_WIFI_VDD33 C_WIFI_VDD33_HF C_WIFI_VDDIO1 C_WIFI_VDDIO1_HF C_WIFI_VDDIO2 C_WIFI_VDDIO2_HF C_WIFI_X32_IN C_WIFI_X32_OUT JP_WIFI_BOOT R_WIFI_BOOT_OVR R_WIFI_BOOT_PD R_WIFI_CS_PD R_WIFI_EN_PD R_WIFI_UART_RX_LINK R_WIFI_UART_TX_LINK R_WIFI_X32_IN R_WIFI_X32_OUT TP_WIFI_BOOT TP_WIFI_CHIP_EN TP_WIFI_UART_RX TP_WIFI_UART_TX U_WIFI1 X_WIFI_32K
component class MCU_ADC_SERVICE: C1_MCU C2_MCU C3_MCU C4_MCU C_ADC1 C_ADC2 C_ADC3 C_ADC4 C_ADC5 C_MCU_BULK C_MCU_VDD1 C_MCU_VDD2 C_MCU_VDD3 C_MCU_VDD4 C_MCU_VDD5 C_NRST C_VBAT C_VDDUSB J_SWD MCU_VCAP R_ADC1 R_ADC2 R_ADC3 R_ADC4 R_ADC5 R_MCU_BOOT0_PD R_NRST R_SPI_CS R_SPI_MISO R_SPI_MOSI R_SPI_SCK TP_GND TP_MCU_BOOT0 U_MCU1
component class POWER_SERVICE: C1_EN1 C2_EN1 C3_EN1 C_BAT C_IN_ C_OUT_ C_UV_BYPASS C_VBUS CU6_1 CUP4 CUP4_1 CUP4_FB CUP5_1 CUP5_2 CUP5_3 CUP5_5 D_CC_ESD D_VBUS J_Li-Po J_USB_C L1 LED_CHG PWR_BTN_N Q_SHDN R_AL R_CHG_LED R_EN R_EN1_1 R_EN1_BIAS R_EN_PD R_INT_PULLUP R_KILL_PU R_LIM R_PGOOD R_SCL R_SDA R_SHDN_G R_SHDN_PD R_TH_BAT R_TMR R_TS_BOTTOM R_TS_SER R_TS_TOP RISET RJ1 RJ2 RUP_3 RUP_4 U_EN1 U_UV1 UP1 UP2 UP3 UP4
component class QUIET_CH4_CH5: CCU7 CCU8 CCU9 CCU10 CH_4 CH_5 CL_4 CL_5 Cservo_4 Cservo_5 CU_14 CU_24 INA4 INA5 J_FPC4 J_FPC5 RDD10 RDD11 RDD12 RDD13 RDD14 RDD15 RG_4 RG_5 RGN_4 RGN_5 RH_4 RH_5 RL_4 RL_5 Rservo_4 Rservo_5 U3
component class QUIET_CH2_CH3: CCU3 CCU4 CCU5 CCU6 CH_2 CH_3 CL_2 CL_3 Cservo_2 Cservo_3 CU_12 CU_22 INA2 INA3 J_FPC2 J_FPC3 RDD4 RDD5 RDD6 RDD7 RDD8 RDD9 RG_2 RG_3 RGN_2 RGN_3 RH_2 RH_3 RL_2 RL_3 Rservo_2 Rservo_3 U2
component class QUIET_CH1_REFERENCE: CCU1 CCU2 Cdiv Cdiv_1 Cdiv_10uF CH_1 CL_1 Cservo_1 CU_11 CU_21 INA1 J_FPC1 J_REF R_ref R_VREF1 R_VREF2 R_VREF3 R_VREF4 R_VREF5 RDD1 RDD2 RDD3 RG_1 RGN_1 RH_1 RL_1 Rservo_1 RV1 RV2 U1
net class EMG_GND: GND
net class EMG_CONTROL: AFE_EN BAT_TEMP FG_ALRT I2C_SCL I2C_SDA KILL_CTRL MCU_BOOT0 MCU_NRST MCU_PWR_INT_N MCU_SHUTDOWN MCU_SWCLK MCU_SWDIO MCU_VCAP MCU_WIFI_UART_RX MCU_WIFI_UART_TX NetC1_EN1_2 NetC2_EN1_1 NetC3_EN1_2 NetCUP4_FB_1 NetD_CC_ESD_1 NetD_CC_ESD_2 NetJP_WIFI_BOOT_1 NetLED_CHG_A NetLED_CHG_C NetPWR_BTN_N_A NetQ_SHDN_1 NetR_EN1_BIAS_2 NetR_LIM_2 NetR_TMR_2 NetRISET_1 SYS_EN TS USB_PGOOD_N WIFI_BOOT WIFI_CHIP_EN WIFI_SPI_RDY WIFI_UART_RX WIFI_UART_TX
net class EMG_ANALOG: INA_OUT_1 INA_OUT_2 INA_OUT_3 INA_OUT_4 INA_OUT_5 NetCH_1_2 NetCH_2_2 NetCH_3_2 NetCH_4_2 NetCH_5_2 NetCL_1_1 NetCL_2_1 NetCL_3_1 NetCL_4_1 NetCL_5_1 NetCservo_1_1 NetCservo_2_1 NetCservo_3_1 NetCservo_4_1 NetCservo_5_1 NetINA1_2 NetINA1_3 NetINA1_7 NetINA2_2 NetINA2_3 NetINA2_7 NetINA3_2 NetINA3_3 NetINA3_7 NetINA4_2 NetINA4_3 NetINA4_7 NetINA5_2 NetINA5_3 NetINA5_7 NetJ_REF_1 Va_1 Va_2 Va_3 Va_4 Va_5 Vb_1 Vb_2 Vb_3 Vb_4 Vb_5 Vc_1 Vc_2 Vc_3 Vc_4 Vc_5 Vservo_1 Vservo_2 Vservo_3 Vservo_4 Vservo_5
net class EMG_CRYSTAL: NetC_WIFI_X32_IN_2 NetC_WIFI_X32_OUT_2 WIFI_X32_RAW_IN WIFI_X32_RAW_OUT
net class EMG_SWITCH: NetL1_1 NetL1_2
net class EMG_SPI: MCU_SPI_MISO MCU_SPI_MOSI MCU_SPI_SCK MCU_WIFI_CS WIFI_SPI_CLK WIFI_SPI_CS WIFI_SPI_MISO WIFI_SPI_MOSI
net class EMG_ADC: ADC_EMG1 ADC_EMG2 ADC_EMG3 ADC_EMG4 ADC_EMG5 VOUT_1 VOUT_2 VOUT_3 VOUT_4 VOUT_5
net class EMG_REFERENCE: NetJ_FPC1_8 NetJ_FPC2_8 NetJ_FPC3_8 NetJ_FPC4_8 NetJ_FPC5_8 VDiv VREF_A VREF_B_SRC
net class EMG_POWER: 3V0_ANA 3V3_DIG VBAT_CELL VBUS VSYS
component class RADIO: C_WIFI_BULK C_WIFI_EN C_WIFI_VDD33 C_WIFI_VDD33_HF C_WIFI_VDDIO1 C_WIFI_VDDIO1_HF C_WIFI_VDDIO2 C_WIFI_VDDIO2_HF C_WIFI_X32_IN C_WIFI_X32_OUT JP_WIFI_BOOT R_WIFI_BOOT_OVR R_WIFI_BOOT_PD R_WIFI_CS_PD R_WIFI_EN_PD R_WIFI_UART_RX_LINK R_WIFI_UART_TX_LINK R_WIFI_X32_IN R_WIFI_X32_OUT TP_WIFI_BOOT TP_WIFI_CHIP_EN TP_WIFI_UART_RX TP_WIFI_UART_TX U_WIFI1 X_WIFI_32K
component class MCU_ADC_SERVICE: C1_MCU C2_MCU C3_MCU C4_MCU C_ADC1 C_ADC2 C_ADC3 C_ADC4 C_ADC5 C_MCU_BULK C_MCU_VDD1 C_MCU_VDD2 C_MCU_VDD3 C_MCU_VDD4 C_MCU_VDD5 C_NRST C_VBAT C_VDDUSB J_SWD MCU_VCAP R_ADC1 R_ADC2 R_ADC3 R_ADC4 R_ADC5 R_MCU_BOOT0_PD R_NRST R_SPI_CS R_SPI_MISO R_SPI_MOSI R_SPI_SCK TP_GND TP_MCU_BOOT0 U_MCU1
component class POWER_SERVICE: C1_EN1 C2_EN1 C3_EN1 C_BAT C_IN_ C_OUT_ C_UV_BYPASS C_VBUS CU6_1 CUP4 CUP4_1 CUP4_FB CUP5_1 CUP5_2 CUP5_3 CUP5_5 D_CC_ESD D_VBUS J_Li-Po J_USB_C L1 LED_CHG PWR_BTN_N Q_SHDN R_AL R_CHG_LED R_EN R_EN1_1 R_EN1_BIAS R_EN_PD R_INT_PULLUP R_KILL_PU R_LIM R_PGOOD R_SCL R_SDA R_SHDN_G R_SHDN_PD R_TH_BAT R_TMR R_TS_BOTTOM R_TS_SER R_TS_TOP RISET RJ1 RJ2 RUP_3 RUP_4 U_EN1 U_UV1 UP1 UP2 UP3 UP4
component class QUIET_CH4_CH5: CCU7 CCU8 CCU9 CCU10 CH_4 CH_5 CL_4 CL_5 Cservo_4 Cservo_5 CU_14 CU_24 INA4 INA5 J_FPC4 J_FPC5 RDD10 RDD11 RDD12 RDD13 RDD14 RDD15 RG_4 RG_5 RGN_4 RGN_5 RH_4 RH_5 RL_4 RL_5 Rservo_4 Rservo_5 U3
component class QUIET_CH2_CH3: CCU3 CCU4 CCU5 CCU6 CH_2 CH_3 CL_2 CL_3 Cservo_2 Cservo_3 CU_12 CU_22 INA2 INA3 J_FPC2 J_FPC3 RDD4 RDD5 RDD6 RDD7 RDD8 RDD9 RG_2 RG_3 RGN_2 RGN_3 RH_2 RH_3 RL_2 RL_3 Rservo_2 Rservo_3 U2
component class QUIET_CH1_REFERENCE: CCU1 CCU2 Cdiv Cdiv_1 Cdiv_10uF CH_1 CL_1 Cservo_1 CU_11 CU_21 INA1 J_FPC1 J_REF R_ref R_VREF1 R_VREF2 R_VREF3 R_VREF4 R_VREF5 RDD1 RDD2 RDD3 RG_1 RGN_1 RH_1 RL_1 Rservo_1 RV1 RV2 U1
net class EMG_GND: GND
net class EMG_CONTROL: AFE_EN BAT_TEMP FG_ALRT I2C_SCL I2C_SDA KILL_CTRL MCU_BOOT0 MCU_NRST MCU_PWR_INT_N MCU_SHUTDOWN MCU_SWCLK MCU_SWDIO MCU_VCAP MCU_WIFI_UART_RX MCU_WIFI_UART_TX NetC1_EN1_2 NetC2_EN1_1 NetC3_EN1_2 NetCUP4_FB_1 NetD_CC_ESD_1 NetD_CC_ESD_2 NetJP_WIFI_BOOT_1 NetLED_CHG_A NetLED_CHG_C NetPWR_BTN_N_A NetQ_SHDN_1 NetR_EN1_BIAS_2 NetR_LIM_2 NetR_TMR_2 NetRISET_1 SYS_EN TS USB_PGOOD_N WIFI_BOOT WIFI_CHIP_EN WIFI_SPI_RDY WIFI_UART_RX WIFI_UART_TX
net class EMG_ANALOG: INA_OUT_1 INA_OUT_2 INA_OUT_3 INA_OUT_4 INA_OUT_5 NetCH_1_2 NetCH_2_2 NetCH_3_2 NetCH_4_2 NetCH_5_2 NetCL_1_1 NetCL_2_1 NetCL_3_1 NetCL_4_1 NetCL_5_1 NetCservo_1_1 NetCservo_2_1 NetCservo_3_1 NetCservo_4_1 NetCservo_5_1 NetINA1_2 NetINA1_3 NetINA1_7 NetINA2_2 NetINA2_3 NetINA2_7 NetINA3_2 NetINA3_3 NetINA3_7 NetINA4_2 NetINA4_3 NetINA4_7 NetINA5_2 NetINA5_3 NetINA5_7 NetJ_REF_1 Va_1 Va_2 Va_3 Va_4 Va_5 Vb_1 Vb_2 Vb_3 Vb_4 Vb_5 Vc_1 Vc_2 Vc_3 Vc_4 Vc_5 Vservo_1 Vservo_2 Vservo_3 Vservo_4 Vservo_5
net class EMG_CRYSTAL: NetC_WIFI_X32_IN_2 NetC_WIFI_X32_OUT_2 WIFI_X32_RAW_IN WIFI_X32_RAW_OUT
net class EMG_SWITCH: NetL1_1 NetL1_2
net class EMG_SPI: MCU_SPI_MISO MCU_SPI_MOSI MCU_SPI_SCK MCU_WIFI_CS WIFI_SPI_CLK WIFI_SPI_CS WIFI_SPI_MISO WIFI_SPI_MOSI
net class EMG_ADC: ADC_EMG1 ADC_EMG2 ADC_EMG3 ADC_EMG4 ADC_EMG5 VOUT_1 VOUT_2 VOUT_3 VOUT_4 VOUT_5
net class EMG_REFERENCE: NetJ_FPC1_8 NetJ_FPC2_8 NetJ_FPC3_8 NetJ_FPC4_8 NetJ_FPC5_8 VDiv VREF_A VREF_B_SRC
net class EMG_POWER: 3V0_ANA 3V3_DIG VBAT_CELL VBUS VSYS

## Components (designator, comment, footprint, x,y, rotation, side; value= is the part's Value field where it differs from the comment)
C1_EN1 "GRM155R61C104KA88D" FP-GRM155-0_05-IPC_C 31.8,52.9 r0 top
C1_MCU "GRM155R61C104KA88D" FP-GRM155-0_05-IPC_C 61.5,37.1 r180 top
C2_EN1 "CC0402KRX7R7BB333" FP-CC0402-MFG 31.9,49.5 r180 top value="33 nF"
C2_MCU "MURATA_GRM155C71C105KE11D" *MURATA_GRM155C71C105KE11D_0 59.5,37.1 r0 top value="1 uF"
C3_EN1 "CC0402KRX5R6BB334" FP-CC0402-MFG 37.1,51.5 r180 top value="330 nF"
C3_MCU "GRM155R61C104KA88D" FP-GRM155-0_05-IPC_C 61.5,35.8 r180 top
C4_MCU "MURATA_GRM155C71C105KE11D" *MURATA_GRM155C71C105KE11D_0 59.5,35.8 r0 top value="1 uF"
C_ADC1 "GRM1555C1E103JE01D" FP-GRM155-0_15-IPC_A 60.3,34.1 r180 top
C_ADC2 "GRM1555C1E103JE01D" FP-GRM155-0_15-IPC_A 60.3,32.45 r180 top
C_ADC3 "GRM1555C1E103JE01D" FP-GRM155-0_15-IPC_A 60.3,30.8 r180 top
C_ADC4 "GRM1555C1E103JE01D" FP-GRM155-0_15-IPC_A 64.6,29.4 r270 top
C_ADC5 "GRM1555C1E103JE01D" FP-GRM155-0_15-IPC_A 67.5,29.4 r90 top
C_BAT "GCM21BC71E106KE36L" FP-GCM21B-0_2-e0_2_0_7-MFG 19.5,45.6 r180 top
C_DRL_DEC "100nF" EMG_DRL_C0402 19,30.2 r90 bottom
C_DRL_FB "1nF" EMG_DRL_C0402 25.45,33.05 r90 bottom
C_IN_ "GRM155C71C105KE11D" *MURATA_GRM155C71C105KE11D_0 23.75,47.35 r180 top value="1 uF"
C_MCU_BULK "GCM21BC71E106KE36L" FP-GCM21B-0_2-e0_2_0_7-MFG 82.1,48.9 r90 top
C_MCU_VDD1 "GRM155R61C104KA88D" FP-GRM155-0_05-IPC_C 61.2,40.5 r0 top
C_MCU_VDD2 "GRM155R61C104KA88D" FP-GRM155-0_05-IPC_C 66,29.7 r90 top
C_MCU_VDD3 "GRM155R61C104KA88D" FP-GRM155-0_05-IPC_C 78,29.9 r90 top
C_MCU_VDD4 "GRM155R61C104KA88D" FP-GRM155-0_05-IPC_C 80.7,45.5 r0 top
C_MCU_VDD5 "GRM155R61C104KA88D" FP-GRM155-0_05-IPC_C 65,49.1 r90 top
C_NRST "GRM155R61C104KA88D" FP-GRM155-0_05-IPC_C 59.1,39 r180 top
C_OUT_ "GCM21BC71E106KE36L" FP-GCM21B-0_2-e0_2_0_7-MFG 26.4,45 r0 top
C_UV_BYPASS "GRM155R61C104KA88D" FP-GRM155-0_05-IPC_C 32.7,39.3 r0 top
C_VBAT "GRM155R61C104KA88D" FP-GRM155-0_05-IPC_C 61.2,43 r0 top
C_VBUS "GRM155C71C105KE11D" *MURATA_GRM155C71C105KE11D_0 18.7,44.2 r0 top value="1 uF"
C_VDDUSB "GRM155R61C104KA88D" FP-GRM155-0_05-IPC_C 80.7,44.1 r0 top
C_WIFI_BULK "GRM219R60J476ME44D" FP-GRM219-0_2-0_1-IPC_A 59.5,48.3 r90 top
C_WIFI_EN "GRM155R61C104KA88D" FP-GRM155-0_05-IPC_C 58.2,43.855 r0 top
C_WIFI_VDD33 "GCM21BC71E106KE36L" FP-GCM21B-0_2-e0_2_0_7-MFG 56.8,40.5 r270 top
C_WIFI_VDD33_HF "GRM155R61C104KA88D" FP-GRM155-0_05-MFG 54.775,41 r270 top
C_WIFI_VDDIO1 "GCM21BC71E106KE36L" FP-GCM21B-0_2-e0_2_0_7-MFG 44,40.5 r90 top
C_WIFI_VDDIO1_HF "GRM155R61C104KA88D" FP-GRM155-0_05-MFG 45.885,41 r270 top
C_WIFI_VDDIO2 "GCM21BC71E106KE36L" FP-GCM21B-0_2-e0_2_0_7-MFG 58.15,51.8 r180 top
C_WIFI_VDDIO2_HF "GRM155R61C104KA88D" FP-GRM155-0_05-MFG 57.7,53.8 r180 top
C_WIFI_X32_IN "DNP" FP-GRM155-0_05-IPC_C 52.85,37.4 r90 top value="DNP - tuning"
C_WIFI_X32_OUT "DNP" FP-GRM155-0_05-IPC_C 50.35,37.4 r90 top value="DNP - tuning"
CCU1 "GRM155R61C104KA88D" FP-GRM155-0_05-IPC_C 24.55,20.55 r0 top
CCU2 "MURATA_GRM155C71C105KE11D" *MURATA_GRM155C71C105KE11D_0 24.55,19.55 r180 top value="1 uF"
CCU3 "MURATA_GRM155C71C105KE11D" *MURATA_GRM155C71C105KE11D_0 37.55,19.55 r180 top value="1 uF"
CCU4 "GRM155R61C104KA88D" FP-GRM155-0_05-IPC_C 37.55,20.55 r0 top
CCU5 "MURATA_GRM155C71C105KE11D" *MURATA_GRM155C71C105KE11D_0 50.55,19.55 r180 top value="1 uF"
CCU6 "GRM155R61C104KA88D" FP-GRM155-0_05-IPC_C 50.55,20.55 r0 top
CCU7 "MURATA_GRM155C71C105KE11D" *MURATA_GRM155C71C105KE11D_0 63.55,19.55 r180 top value="1 uF"
CCU8 "GRM155R61C104KA88D" FP-GRM155-0_05-IPC_C 63.55,20.55 r0 top
CCU9 "MURATA_GRM155C71C105KE11D" *MURATA_GRM155C71C105KE11D_0 76.55,19.55 r180 top value="1 uF"
CCU10 "GRM155R61C104KA88D" FP-GRM155-0_05-IPC_C 76.55,20.55 r0 top
Cdiv "GRM155R61C104KA88D" FP-GRM155-0_05-IPC_C 20.6,30 r0 top
Cdiv_1 "GRM155R61C104KA88D" FP-GRM155-0_05-IPC_C 29.9,25 r180 top
Cdiv_10uF "GCM21BC71E106KE36L" FP-GCM21B-0_2-e0_2_0_7-MFG 32.2,24.8 r180 top
CH_1 "GRM1555C1H392GE01D" CAPC1005X55N 19.5,28.625 r270 top
CH_2 "GRM1555C1H392GE01D" CAPC1005X55N 36.5,27.625 r270 top
CH_3 "GRM1555C1H392GE01D" CAPC1005X55N 47.5,24.375 r90 top
CH_4 "GRM1555C1H392GE01D" CAPC1005X55N 58.5,26.425 r270 top
CH_5 "GRM1555C1H392GE01D" CAPC1005X55N 69.5,23.175 r90 top
CL_1 "GRM21BR71C824KA01L" CAPC2013X135X45ML10T25 16.1,30.5 r0 top
CL_2 "GRM21BR71C824KA01L" CAPC2013X135X45ML10T25 33.1,29.5 r0 top
CL_3 "GRM21BR71C824KA01L" CAPC2013X135X45ML10T25 51.7,23.7 r180 top
CL_4 "GRM21BR71C824KA01L" CAPC2013X135X45ML10T25 55.1,28.3 r0 top
CL_5 "GRM21BR71C824KA01L" CAPC2013X135X45ML10T25 70.5,20.5 r180 top
Cservo_1 "GRM31CR71E335KA88L" GRM31x 18.8,25.7 r180 top
Cservo_2 "GRM31CR71E335KA88L" GRM31x 35.8,24.7 r180 top
Cservo_3 "GRM31CR71E335KA88L" GRM31x 48.2,27.3 r0 top
Cservo_4 "GRM31CR71E335KA88L" GRM31x 57.8,23.5 r180 top
Cservo_5 "GRM31CR71E335KA88L" GRM31x 70.2,26.1 r0 top
CU6_1 "GRM155R61C104KA88D" FP-GRM155-0_05-IPC_C 20.2,37.2 r0 top
CU_11 "GRM155R61C104KA88D" FP-GRM155-0_05-IPC_C 20.3,27 r0 top
CU_12 "GRM155R61C104KA88D" FP-GRM155-0_05-IPC_C 37.3,26 r0 top
CU_14 "GRM155R61C104KA88D" FP-GRM155-0_05-IPC_C 59.3,24.8 r0 top
CU_21 "MURATA_GRM155C71C105KE11D" *MURATA_GRM155C71C105KE11D_0 18.7,27 r180 top value="1 uF"
CU_22 "MURATA_GRM155C71C105KE11D" *MURATA_GRM155C71C105KE11D_0 35.7,26 r180 top value="1 uF"
CU_24 "MURATA_GRM155C71C105KE11D" *MURATA_GRM155C71C105KE11D_0 57.7,24.8 r180 top value="1 uF"
CUP4 "GRM219R60J476ME44D" FP-GRM219-0_2-0_1-IPC_A 36.6,45 r270 top
CUP4_1 "GCM21BC71E106KE36L" FP-GCM21B-0_2-e0_2_0_7-MFG 31.4,45 r270 top
CUP4_FB "GRM1555C1H100JA01D" CAPC1005X55X25LL05T10 35.3,41.7 r0 top
CUP5_1 "GRM155C71C105KE11D" *MURATA_GRM155C71C105KE11D_0 35.9,35.4 r180 top value="1 uF"
CUP5_2 "GRM155C71C105KE11D" *MURATA_GRM155C71C105KE11D_0 41.2,35.4 r180 top value="1 uF"
CUP5_3 "GCM21BC71E106KE36L" FP-GCM21B-0_2-e0_2_0_7-MFG 42,33.8 r180 top
CUP5_5 "GCM21BC71E106KE36L" FP-GCM21B-0_2-e0_2_0_7-MFG 35.5,37 r180 top
D_CC_ESD "PESD5V0X2UTR" SOT95P230X100-3N 19.8,48.5 r180 top
D_VBUS "PESD5V0S1BA,115" FP-SOD323-CA-MFG 18.5,42 r90 top
INA1 "AD8237ARMZ" EMG_AD8237_R3_MSOP8 22,18.2 r0 top
INA2 "AD8237ARMZ" EMG_AD8237_R3_MSOP8 35,18.2 r0 top
INA3 "AD8237ARMZ" EMG_AD8237_R3_MSOP8 48,18.2 r0 top
INA4 "AD8237ARMZ" EMG_AD8237_R3_MSOP8 61,18.2 r0 top
INA5 "AD8237ARMZ" EMG_AD8237_R3_MSOP8 74,18.2 r0 top
J_FPC1 "BK13C06-10DS/2-0.35V(895)" HIROSE_BK13C06-10DS/2-0.35V(895) 22,12.2 r0 top
J_FPC2 "BK13C06-10DS/2-0.35V(895)" HIROSE_BK13C06-10DS/2-0.35V(895) 35,12.2 r0 top
J_FPC3 "BK13C06-10DS/2-0.35V(895)" HIROSE_BK13C06-10DS/2-0.35V(895) 48,12.2 r0 top
J_FPC4 "BK13C06-10DS/2-0.35V(895)" HIROSE_BK13C06-10DS/2-0.35V(895) 61,12.2 r0 top
J_FPC5 "BK13C06-10DS/2-0.35V(895)" HIROSE_BK13C06-10DS/2-0.35V(895) 74,12.2 r0 top
J_Li-Po "Header 3" HDR1X3 12,34.8 r0 top
J_REF "REFERENCE ELECTRODE:" HDR1X2 12.5,19 r0 top
J_SWD "Header 5H" HDR1X5H 86,38 r90 top
J_USB_C "USB4105-GF-A-060" GCT_USB4105-GF-A-060 12.4,47 r270 top
JP_WIFI_BOOT "Header 2H" HDR1X2H 82.3,17.4 r0 top
L1 "DFE21CCN1R0MELL" FP-DFE21CC_EL-MFG 34,47.2 r180 top
LED_CHG "SML-LXT0805SRW-TR" LEDC2012X120N 20,53 r0 top
MCU_VCAP "CL21A475KOFNNNE" CAPC2012X135N 75.6,29.4 r90 top
PWR_BTN_N "TS-1187A-B-A-B" SW_TS-1187A-B-A-B 27.3,51.2 r0 top
Q_SHDN "BSS138" FP-318-08-IPC_B 40,51.5 r180 top
R_ADC1 "0402WGF3300TCE" RESC1005X40N 62,34.1 r90 top
R_ADC2 "0402WGF3300TCE" RESC1005X40N 62,32.45 r90 top
R_ADC3 "0402WGF3300TCE" RESC1005X40N 62,30.8 r90 top
R_ADC4 "0402WGF3300TCE" RESC1005X40N 62.8,29.4 r0 top
R_ADC5 "0402WGF3300TCE" RESC1005X40N 69,28.5 r180 top
R_AL "AT0402DRD0710KL" FP-AT0402-IPC_A 25.2,36.7 r0 top
R_CHG_LED "AC0402FR-071K5L" FP-AC0402-MFG 22.8,53 r0 top
R_DRL_FB "1.5M" EMG_DRL_R0603 25.45,30.2 r90 bottom
R_DRL_OUT1 "470k" EMG_DRL_R0603 16,29.5 r0 bottom
R_DRL_OUT2 "470k" EMG_DRL_R0603 16,31.3 r0 bottom
R_DRL_SEL "0R" EMG_DRL_R0603 13.5,21.7 r0 bottom
R_DRL_VA1 "1M" EMG_DRL_R0603 14.5,23.5 r0 bottom
R_DRL_VA2 "1M" EMG_DRL_R0603 17.85,23.5 r0 bottom
R_DRL_VA3 "1M" EMG_DRL_R0603 21.2,23.5 r0 bottom
R_DRL_VA4 "1M" EMG_DRL_R0603 24.55,23.5 r0 bottom
R_DRL_VA5 "1M" EMG_DRL_R0603 27.9,23.5 r0 bottom
R_DRL_VB1 "1M" EMG_DRL_R0603 14.5,25.3 r0 bottom
R_DRL_VB2 "1M" EMG_DRL_R0603 17.85,25.3 r0 bottom
R_DRL_VB3 "1M" EMG_DRL_R0603 21.2,25.3 r0 bottom
R_DRL_VB4 "1M" EMG_DRL_R0603 24.55,25.3 r0 bottom
R_DRL_VB5 "1M" EMG_DRL_R0603 27.9,25.3 r0 bottom
R_DRL_VC1 "1M" EMG_DRL_R0603 14.5,27.1 r0 bottom
R_DRL_VC2 "1M" EMG_DRL_R0603 17.85,27.1 r0 bottom
R_DRL_VC3 "1M" EMG_DRL_R0603 21.2,27.1 r0 bottom
R_DRL_VC4 "1M" EMG_DRL_R0603 24.55,27.1 r0 bottom
R_DRL_VC5 "1M" EMG_DRL_R0603 27.9,27.1 r0 bottom
R_EN "AC0402FR-7D100KL" FP-AC0402-MFG 31,42.5 r0 top value=100KΩ
R_EN1_1 "RC0402FR-071KL" FP-RC0402-0_4-IPC_A 32,53.8 r0 top
R_EN1_BIAS "AT0402DRD0710KL" FP-AT0402-IPC_A 22.9,42 r90 top
R_EN_PD "AC0402FR-071ML" FP-AC0402-IPC_A 35.6,33.1 r0 top
R_INT_PULLUP "AT0402DRD0710KL" FP-AT0402-IPC_A 36.9,49.3 r180 top
R_KILL_PU "AT0402DRD0710KL" FP-AT0402-IPC_A 36.9,53 r0 top
R_LIM "AC0402FR-073K48L" FP-AC0402-MFG 26,46.3 r180 top
R_MCU_BOOT0_PD "RT0402BRD0710KL" FP-RT0402-MFG 68,49.1 r270 top value=10KΩ
R_NRST "RT0402BRD0710KL" FP-RT0402-MFG 61,39 r180 top value=10KΩ
R_PGOOD "RC0402FR-0747KL" RESC1005X40X25ML05T10 24.2,42.1 r90 top
R_ref "AC0402FR-7D100KL" FP-AC0402-MFG 16.5,21.4 r0 top value=100KΩ
R_SCL "CRCW04024K70FKED" FP-CRCW0402-e3-IPC_B 25,37.8 r0 top
R_SDA "CRCW04024K70FKED" FP-CRCW0402-e3-IPC_B 25,38.8 r0 top
R_SHDN_G "AT0402DRD0710KL" FP-AT0402-IPC_A 42.8,50.8 r0 top
R_SHDN_PD "AC0402FR-7D100KL" FP-AC0402-MFG 42.8,52 r0 top value=100KΩ
R_SPI_CS "ERJ2RKF22R0X" RES_ERJ2RKF22R0X 71.4,30.05 r90 top
R_SPI_MISO "ERJ2RKF22R0X" RES_ERJ2RKF22R0X 43,53.2 r180 top
R_SPI_MOSI "ERJ2RKF22R0X" RES_ERJ2RKF22R0X 70,30.05 r90 top
R_SPI_SCK "ERJ2RKF22R0X" RES_ERJ2RKF22R0X 68.6,30.05 r90 top
R_TH_BAT "103AT-2" EMG_REMOTE_NTC_TERMINALS_2P 14.2,38.7 r0 top
R_TMR "RC0402FR-0768K1L" RESC1005X40X25ML05T10 27.4,47.6 r90 top
R_TS_BOTTOM "RC0402FR-0728KL" RESC1005X40X25NL05T10 22.9,49.5 r90 top
R_TS_SER "AC0402FR-7D100KL" FP-AC0402-MFG 22.5,48.2 r0 top value=100KΩ
R_TS_TOP "RC0402FR0733K2L" RESC1005X40X25NL05T10 22,49.6 r90 top
R_VREF1 "ERA2AEB680X" RES_ERA2AEB680X 30.2,30.2 r90 top
R_VREF2 "ERA2AEB680X" RES_ERA2AEB680X 32,31.4 r90 top
R_VREF3 "ERA2AEB680X" RES_ERA2AEB680X 33.8,31.4 r90 top
R_VREF4 "ERA2AEB680X" RES_ERA2AEB680X 36.1,31 r90 top
R_VREF5 "ERA2AEB680X" RES_ERA2AEB680X 37.4,30.2 r90 top
R_WIFI_BOOT_OVR "0402WGF1001TCE" RESC1005X40N 80.5,23 r0 top
R_WIFI_BOOT_PD "RT0402BRD0710KL" FP-RT0402-MFG 42.8,48.8 r0 top value=10KΩ
R_WIFI_CS_PD "RT0402BRD0710KL" FP-RT0402-MFG 60.6,52.7 r90 top value=10KΩ
R_WIFI_EN_PD "RT0402BRD0710KL" FP-RT0402-MFG 59.7,45 r90 top value=10KΩ
R_WIFI_UART_RX_LINK "ERJ2GE0R00X" RESC1005X40X25LL05T05 82,29 r0 top
R_WIFI_UART_TX_LINK "ERJ2GE0R00X" RESC1005X40X25LL05T05 82,32 r0 top
R_WIFI_X32_IN "ERJ2GE0R00X" RESC1005X40X25LL05T05 52.235,41.2 r90 top
R_WIFI_X32_OUT "ERJ2GE0R00X" RESC1005X40X25LL05T05 50.965,41.2 r90 top
RDD1 "ERA2ARB103X" RES_ERA2ARB103X 27.8,16.8 r0 top
RDD2 "AR02BTC5001" FP-AC0402-MFG 27.8,15 r0 top value=5KΩ
RDD3 "ERA2ARB103X" RES_ERA2ARB103X 27.8,18.6 r0 top
RDD4 "ERA2ARB103X" RES_ERA2ARB103X 40.8,16.8 r0 top
RDD5 "AR02BTC5001" FP-AC0402-MFG 40.8,15 r0 top value=5KΩ
RDD6 "ERA2ARB103X" RES_ERA2ARB103X 40.8,18.6 r0 top
RDD7 "ERA2ARB103X" RES_ERA2ARB103X 53.8,16.8 r0 top
RDD8 "AR02BTC5001" FP-AC0402-MFG 53.8,15 r0 top value=5KΩ
RDD9 "ERA2ARB103X" RES_ERA2ARB103X 53.8,18.6 r0 top
RDD10 "ERA2ARB103X" RES_ERA2ARB103X 66.8,16.8 r0 top
RDD11 "AR02BTC5001" FP-AC0402-MFG 66.8,15 r0 top value=5KΩ
RDD12 "ERA2ARB103X" RES_ERA2ARB103X 66.8,18.6 r0 top
RDD13 "ERA2ARB103X" RES_ERA2ARB103X 79.4,16.8 r0 top
RDD14 "AR02BTC5001" FP-AC0402-MFG 79.4,15 r0 top value=5KΩ
RDD15 "ERA2ARB103X" RES_ERA2ARB103X 79.4,18.6 r0 top
RG_1 "RT0402BRD0780K6L" FP-RT0402-MFG 20.5,28.625 r90 top value=80.6KΩ
RG_2 "RT0402BRD0780K6L" FP-RT0402-MFG 37.5,27.625 r90 top value=80.6KΩ
RG_3 "RT0402BRD0780K6L" FP-RT0402-MFG 46.5,24.375 r270 top value=80.6KΩ
RG_4 "RT0402BRD0780K6L" FP-RT0402-MFG 59.5,26.425 r90 top value=80.6KΩ
RG_5 "RT0402BRD0780K6L" FP-RT0402-MFG 68.5,23.175 r270 top value=80.6KΩ
RGN_1 "RT0402BRD0710KL" FP-RT0402-MFG 18.9,29.9 r0 top value=10KΩ
RGN_2 "RT0402BRD0710KL" FP-RT0402-MFG 35.9,28.9 r0 top value=10KΩ
RGN_3 "RT0402BRD0710KL" FP-RT0402-MFG 48.9,23.7 r180 top value=10KΩ
RGN_4 "RT0402BRD0710KL" FP-RT0402-MFG 57.9,27.7 r0 top value=10KΩ
RGN_5 "RT0402BRD0710KL" FP-RT0402-MFG 70.1,21.9 r180 top value=10KΩ
RH_1 "ERA-2AEB2612X" FP-AC0402-IPC_A 21.4,21.75 r0 top
RH_2 "ERA-2AEB2612X" FP-AC0402-IPC_A 34.4,21.75 r0 top
RH_3 "ERA-2AEB2612X" FP-AC0402-IPC_A 47.4,21.75 r0 top
RH_4 "ERA-2AEB2612X" FP-AC0402-IPC_A 59.2,21.75 r0 top
RH_5 "ERA-2AEB2612X" FP-AC0402-IPC_A 73.4,21.75 r0 top
RISET "RC0402FR-072K94L" RESC1005X40X25ML05T10 21,51 r270 top
RJ1 "RC0402FR-075K1L" RESC1005X40X25NL05T10 18.9,50.7 r0 top
RJ2 "RC0402FR-075K1L" RESC1005X40X25NL05T10 18.9,51.7 r0 top
RL_1 "RT0402BRD071K07L" FP-RT0402-MFG 23.4,22.3 r0 top value=1.07KΩ
RL_2 "RT0402BRD071K07L" FP-RT0402-MFG 36.4,22.3 r0 top value=1.07KΩ
RL_3 "RT0402BRD071K07L" FP-RT0402-MFG 49.4,22.3 r0 top value=1.07KΩ
RL_4 "RT0402BRD071K07L" FP-RT0402-MFG 62.2,21.7 r0 top value=1.07KΩ
RL_5 "RT0402BRD071K07L" FP-RT0402-MFG 75.4,22.3 r0 top value=1.07KΩ
Rservo_1 "RC0402FR-072ML" RESC1005X40X25NL05T10 20.2,24.2 r180 top
Rservo_2 "RC0402FR-072ML" RESC1005X40X25NL05T10 37.2,23.2 r180 top
Rservo_3 "RC0402FR-072ML" RESC1005X40X25NL05T10 46.8,28.8 r0 top
Rservo_4 "RC0402FR-072ML" RESC1005X40X25NL05T10 58.4,20.8 r180 top
Rservo_5 "RC0402FR-072ML" RESC1005X40X25NL05T10 68.8,27.6 r0 top
RUP_3 "AC0402FR-07560KL" FP-AC0402-IPC_A 35.3,42.7 r0 top
RUP_4 "AC0402FR-7D100KL" FP-AC0402-MFG 33.4,42.7 r0 top value=100KΩ
RV1 "AC0402FR-7D100KL" FP-AC0402-MFG 30.2,26 r180 top value=100KΩ
RV2 "AC0402FR-7D100KL" FP-AC0402-MFG 30.2,27 r0 top value=100KΩ
TP_GND "5021" TP_5021 86,26 r90 top
TP_MCU_BOOT0 "5021" TP_5021 82,20 r90 top
TP_WIFI_BOOT "5021" TP_5021 86,23 r90 top
TP_WIFI_CHIP_EN "5021" TP_5021 86,20 r90 top
TP_WIFI_UART_RX "5021" TP_5021 86,32 r90 top
TP_WIFI_UART_TX "5021" TP_5021 86,29 r90 top
U1 "MCP6404T-E/ST" TSSOP-ST14_N 25,27 r0 top
U2 "MCP6404T-E/ST" TSSOP-ST14_N 42,26 r0 top
U3 "MCP6404T-E/ST" TSSOP-ST14_N 64,24.8 r0 top
U_DRL1 "MCP6401T-E/OT" EMG_MCP6401_SOT23_5 22,31 r90 bottom
U_EN1 "LTC2954ITS8-1#TRMPBF" LT-TS8-8-TSOT-23_V 34,51.2 r0 top
U_MCU1 "STM32U575VIT6" QFP50P1600X1600X160-100N 71,39.5 r0 top
U_UV1 "TPS3808G33DBVR" DBV0006A_L 30,38.2 r0 top
U_WIFI1 "ST67W611M1A6BTR" ST67W611M1A6BTR 50,50.8 r0 top
UP1 "BQ24072TRGTR" RGT0016C_V 23,45 r0 top
UP2 "TPS631000DRLR" SOT50P160X60-8N 34,45 r270 top
UP3 "TPS7A2030PDBVR" FP-DBV0005A-IPC_C 38.5,34.4 r0 top
UP4 "MAX17048G+T10" SON50P200X200X80-9N 22.6,37.5 r0 top
X_WIFI_32K "Q13FC13500003" EMG_FC135_3215_2P 51.6,39.3 r180 top value="32.768 kHz"

## Footprints (in the part's own frame and the unit in brackets; to place one, negate y for a bottom-side part, rotate by r counter-clockwise, add the part's x,y. Pads: shape width x height; smd on the part's side, far side on the other; paste and mask are expansions set on the pad)
*MURATA_GRM155C71C105KE11D_0 [mm]
  rect 0.4x0.5 smd: 1(-0.4,0) 2(0.4,0)
  silkscreen extent -0.53,-0.63 0.53,0.63, body extent -0.55,-0.3 0.55,0.3, height 0.6
CAPC1005X55N [mm]
  rect 0.54x0.6 smd paste+0 mask+0.102: 1(-0.432,0) 2(0.432,0)
  body extent -0.5,-0.25 0.5,0.25, height 0.55
CAPC1005X55X25LL05T10 [mm] "Chip Capacitor, 2-Leads, Body 1.00x0.50mm, IPC High Density"
  rect 0.56x0.52 smd: 1(-0.39,0) 2(0.39,0)
  body extent -0.53,-0.28 0.53,0.28, height 0.55
CAPC2012X135N [mm]
  rrect25% 1.05x1.38 smd paste+0 mask+0.05: 1(-0.888,0) 2(0.888,0)
  body extent -1,-0.63 1,0.63, height 1.35
CAPC2013X135X45ML10T25 [mm] "Chip Capacitor, 2-Leads, Body 2.00x1.25mm, IPC Low Density"
  rect 1.4x1.5 smd: 1(-0.95,0) 2(0.95,0)
  body extent -1.05,-0.67 1.05,0.67, height 1.35
DBV0006A_L [mm] "SOT23, 6-Leads, Body 3.05x1.75mm, Pitch 0.95mm, IPC High Density"
  rrect18% 0.8x0.55 smd: 1(-1.275,0.95) 2(-1.275,0) 3(-1.275,-0.95) 4(1.275,-0.95) 5(1.275,0) 6(1.275,0.95)
  silkscreen extent -1.4,-1.55 0.5,1.9, body extent -1.42,-1.46 1.42,1.46, height 1.11
EMG_AD8237_R3_MSOP8 [mm] "AD8237ARMZ RM-8; numeric pin mapping 1-8; R3 2026-09-12; geometry retained from inspected source"
  rect 0.35x1.1 smd mask+0.05: 1(-0.975,-2.35) 2(-0.325,-2.35) 3(0.325,-2.35) 4(0.975,-2.35) 5(0.975,2.35) 6(0.325,2.35) 7(-0.325,2.35) 8(-0.975,2.35)
  silkscreen extent -2.36,-1.93 1.6,1.6, body extent -1.5,-2.45 1.5,2.45, height 1.1
EMG_DRL_C0402 [mm] "DRL DNP provision; pad geometry from manufacturer documented recommended land pattern; controlled source package graphics retained"
  rect 0.4x0.5 smd paste+0 mask+0: 1(-0.4,0) 2(0.4,0)
  silkscreen extent -0.64,-0.67 0.64,0.67, body extent -0.5,-0.25 0.5,0.25, height 0.55
EMG_DRL_R0603 [mm] "DRL DNP provision; pad geometry from manufacturer documented recommended land pattern; controlled source package graphics retained"
  rect 0.65x0.9 smd: 1(-0.725,0) 2(0.725,0)
  silkscreen extent -0.03,-0.4 0.03,0.4
EMG_FC135_3215_2P [mm] "Epson Q13FC13500003 FC-135, 3.2x1.5mm, two numeric pads; preserved 1.0x1.8mm lands at 2.5mm pitch"
  rect 1x1.8 smd: 1(-1.25,0) 2(1.25,0)
  silkscreen extent -0.4,-0.75 0.4,0.75, body extent 0,0 0,0
EMG_MCP6401_SOT23_5 [mm] "DRL DNP provision; pad geometry from manufacturer documented recommended land pattern; controlled source package graphics retained"
  rect 0.6x1.1 smd paste+0 mask+0: 1(-0.95,-1.4) 2(0,-1.4) 3(0.95,-1.4) 4(0.95,1.4) 5(-0.95,1.4)
  silkscreen extent -2.45,0.85 0.05,1.45, body extent -1.4,-1.45 1.4,1.45, height 1.45
EMG_REMOTE_NTC_TERMINALS_2P [mm] "Wire-termination provision ONLY. Copper/drill copied unchanged from FP-103AT-2-MFG. Remote sensor body excluded; wire fit and strain relief require qualification."
  rect 1.15x1.15 hole 0.65 paste-1000 mask+0: 1(-1.27,0)
  round 1.15 hole 0.65 paste-1000 mask+0: 2(1.27,0)
FP-318-08-IPC_B [mm]
  rect 1.524x0.578 smd paste+0 mask+0: 1(-0.91,0.95)
  rrect100% 1.524x0.578 smd paste+0 mask+0: 2(-0.91,-0.95) 3(0.91,0)
  silkscreen extent -0.65,-1.45 0.65,1.45, body extent -1.92,-1.7 1.92,1.7, height 0.25
FP-AC0402-IPC_A [mm]
  rect 0.715x0.672 smd paste+0 mask+0: 1(-0.479,0) 2(0.479,0)
  silkscreen extent -0.84,-0.74 0.84,0.74, body extent -1.04,-0.54 1.04,0.54, height 0.25
FP-AC0402-MFG [mm]
  rect 0.5x0.6 smd paste+0 mask+0: 1(-0.5,0) 2(0.5,0)
  silkscreen extent -0.5,-0.67 0.5,0.67, body extent -0.85,-0.4 0.85,0.4, height 0.25
FP-AT0402-IPC_A [mm]
  rect 0.76x0.672 smd paste+0 mask+0: 1(-0.476,0) 2(0.476,0)
  silkscreen extent -0.86,-0.74 0.86,-0.74, body extent -1.06,-0.54 1.06,0.54, height 0.25
FP-CC0402-MFG [mm]
  rect 0.5x0.5 smd paste+0 mask+0: 1(-0.5,0) 2(0.5,0)
  silkscreen extent -0.53,0.67 0.53,0.67, body extent -0.87,-0.48 0.87,0.48, height 0.25
FP-CRCW0402-e3-IPC_B [mm]
  rect 0.568x0.572 smd paste+0 mask+0: 1(-0.452,0) 2(0.452,0)
  body extent -0.89,-0.44 0.89,0.44, height 0.25
FP-DBV0005A-IPC_C [mm]
  rect 1.205x0.532 smd paste+0 mask+0: 1(-1.05,0.95)
  rrect100% 1.205x0.532 smd paste+0 mask+0: 2(-1.05,0) 3(-1.05,-0.95) 4(1.05,-0.95) 5(1.05,0.95)
  silkscreen extent -1.13,-1.45 0.05,2.03, body extent -1.75,-1.55 1.75,1.55, height 0.25
FP-DFE21CC_EL-MFG [mm]
  rect 0.8x1.4 smd paste+0 mask+0: 1(0.8,0) 2(-0.8,0)
  silkscreen extent 0,-0.7 0,0.7, body extent -1.3,-0.8 1.3,0.8, height 0.25
FP-GCM21B-0_2-e0_2_0_7-MFG [mm]
  rect 0.7x1.3 smd paste+0 mask+0: 1(-0.95,0) 2(0.95,0)
  silkscreen extent -0.23,-0.72 0.23,-0.72, body extent -1.4,-0.82 1.4,0.82, height 0.25
FP-GRM155-0_05-IPC_C [mm]
  rect 0.515x0.472 smd paste+0 mask+0: 1(-0.379,0) 2(0.379,0)
  body extent -0.74,-0.38 0.74,0.38, height 0.25
FP-GRM155-0_05-MFG [mm]
  rect 0.55x0.5 smd paste+0 mask+0: 1(-0.475,0) 2(0.475,0)
  silkscreen extent -0.5,-0.65 0.5,0.65, body extent -0.85,-0.38 0.85,0.38, height 0.25
FP-GRM155-0_15-IPC_A [mm]
  rect 0.804x0.758 smd paste+0 mask+0: 1(-0.477,0) 2(0.477,0)
  silkscreen extent -0.88,-0.78 0.88,0.78, body extent -1.08,-0.58 1.08,0.58, height 0.25
FP-GRM219-0_2-0_1-IPC_A [mm]
  rect 1.455x1.556 smd paste+0 mask+0: 1(-0.926,0) 2(0.926,0)
  silkscreen extent -1.65,-1.18 1.65,1.18, body extent -2.15,-1.28 2.15,1.28, height 0.25
FP-RC0402-0_4-IPC_A [mm]
  rect 0.715x0.672 smd paste+0 mask+0: 1(-0.479,0) 2(0.479,0)
  body extent -1.04,-0.54 1.04,0.54, height 0.25
FP-RT0402-MFG [mm]
  rect 0.5x0.6 smd paste+0 mask+0: 1(-0.5,0) 2(0.5,0)
  silkscreen extent -0.5,-0.71 0.5,0.7, body extent -0.85,-0.4 0.85,0.4, height 0.25
FP-SOD323-CA-MFG [mm]
  rect 0.6x0.6 smd paste-1000 mask+0: 1(-1.1,0) 2(1.1,0)
  silkscreen extent -0.43,-0.67 0.43,-0.67, body extent -1.53,-0.82 1.53,0.82, height 0.25
GCT_USB4105-GF-A-060 [mm]
  rect 0.6x1.15 smd mask+0.02: A1_B12(-3.2,4.755) B1_A12(3.2,4.755)
  rect 0.6x1.15 smd mask+0.04: A4_B9(-2.4,4.755) B4_A9(2.4,4.755)
  rect 0.3x1.15 smd mask+0.04: A5(-1.25,4.755) A6(-0.25,4.755) A7(0.25,4.755) A8(1.25,4.755) B5(1.75,4.755) B6(0.75,4.755) B7(-0.75,4.755) B8(-1.75,4.755)
  oval 1x2.1 hole 0.6 slot 1.7 at 90 deg: SH1(-4.32,4.18) SH2(4.32,4.18)
  rrect50% 1x1.8 hole 0.6 slot 1.4 at 90 deg: SH3(-4.32,0) SH4(4.32,0)
  round 0.65 hole 0.65 unplated: ""(-2.89,3.68) ""(2.89,3.68)
  silkscreen extent -4.47,1.4 4.47,2.65, body extent -4.47,-2.6 4.47,5.11, height 3.31
GRM31x [mm] "Murata GRM31CR71E335KA88L 3.3uF 25V X7R 1206; maximum component height 1.8mm; existing lands unchanged"
  rect 1.05x1.6 smd: 1(-1.475,0) 2(1.475,0)
  body extent -1.6,-0.8 1.6,0.8, height 1
HDR1X2 [mm] "Connector; Header; 2 Position"
  rect 1.5x1.5 hole 0.9: 1(0,0)
  round 1.5 hole 0.9: 2(2.54,0)
  silkscreen extent -1.27,-1.27 3.81,1.27
HDR1X2H [mm] "Connector; Header; 2 Position; Right Angle"
  rect 1.5x1.5 hole 0.9: 1(0,0)
  round 1.5 hole 0.9: 2(2.54,0)
  silkscreen extent -1.27,-6.35 3.81,-1.27
HDR1X3 [mm] "Connector; Header; 3 Position"
  rect 1.5x1.5 hole 0.9: 1(0,0)
  round 1.5 hole 0.9: 2(2.54,0) 3(5.08,0)
  silkscreen extent -1.27,-1.27 6.35,1.27
HDR1X5H [mm] "Connector; Header; 5 Position; Right Angle"
  rect 1.5x1.5 hole 0.9: 1(0,0)
  round 1.5 hole 0.9: 2(2.54,0) 3(5.08,0) 4(7.62,0) 5(10.16,0)
  silkscreen extent -1.27,-2.54 11.43,-1.27
HIROSE_BK13C06-10DS/2-0.35V(895) [mm]
  rect 0.18x0.325 smd paste+0 mask+0.025: 1(-0.7,0.887) 2(-0.35,0.887) 3(0,0.887) 4(0.35,0.887) 5(0.7,0.887) 6(-0.7,-0.887) 7(-0.35,-0.887) 8(0,-0.887) 9(0.35,-0.887) 10(0.7,-0.887)
  rect 0.75x0.235 smd paste+0 mask+0.09: P1_1(-1.435,0.933) P1_3(-1.435,-0.933) P2_1(1.435,0.933) P2_3(1.435,-0.933)
  rect 0.215x1.04 smd paste+0 mask+0.09: P1_2(-2.015,0) P2_2(2.015,0)
  Keep-Out Layer region: 1.907,-0.815 0.79,-0.815 0.79,-0.725 -0.79,-0.725 -0.79,-0.815 -1.907,-0.815 -1.907,0.815 -0.79,0.815 -0.79,0.725 0.79,0.725 0.79,0.815 1.907,0.815
  silkscreen extent -0.78,1.5 -0.61,1.67
LEDC2012X120N [mm]
  rect 1.1x1.45 smd: A(0.9,0) C(-0.9,0)
  silkscreen extent -2.1,-0.1 -1.9,0.1, body extent -1,-0.65 1,0.65, height 0.9
LT-TS8-8-TSOT-23_V [mm] "SOT23, 8-Leads, Body 2.9x1.75mm, Pitch 0.65mm"
  rect 1.22x0.4 smd: 1(-1.31,0.975) 2(-1.31,0.325) 3(-1.31,-0.325) 4(-1.31,-0.975) 5(1.31,-0.975) 6(1.31,-0.325) 7(1.31,0.325) 8(1.31,0.975)
  silkscreen extent -2.59,-1.45 0.3,1.45, body extent -0.87,-1.45 0.88,1.45, height 1